# Altium PCB PCB_ESP32_GROUPE5.PcbDoc
Units mm, origin at the board's own origin, x right, y up, seen from the top; angles counter-clockwise.
Board outline 70 x 50 mm, 4 copper layers (Top Layer, Layer 2, Layer 3, Bottom Layer), stack 1.536 mm thick; 72 components, 69 nets, 304 pads, 61 vias.
Unrouted connection lines stored in the file: 15.
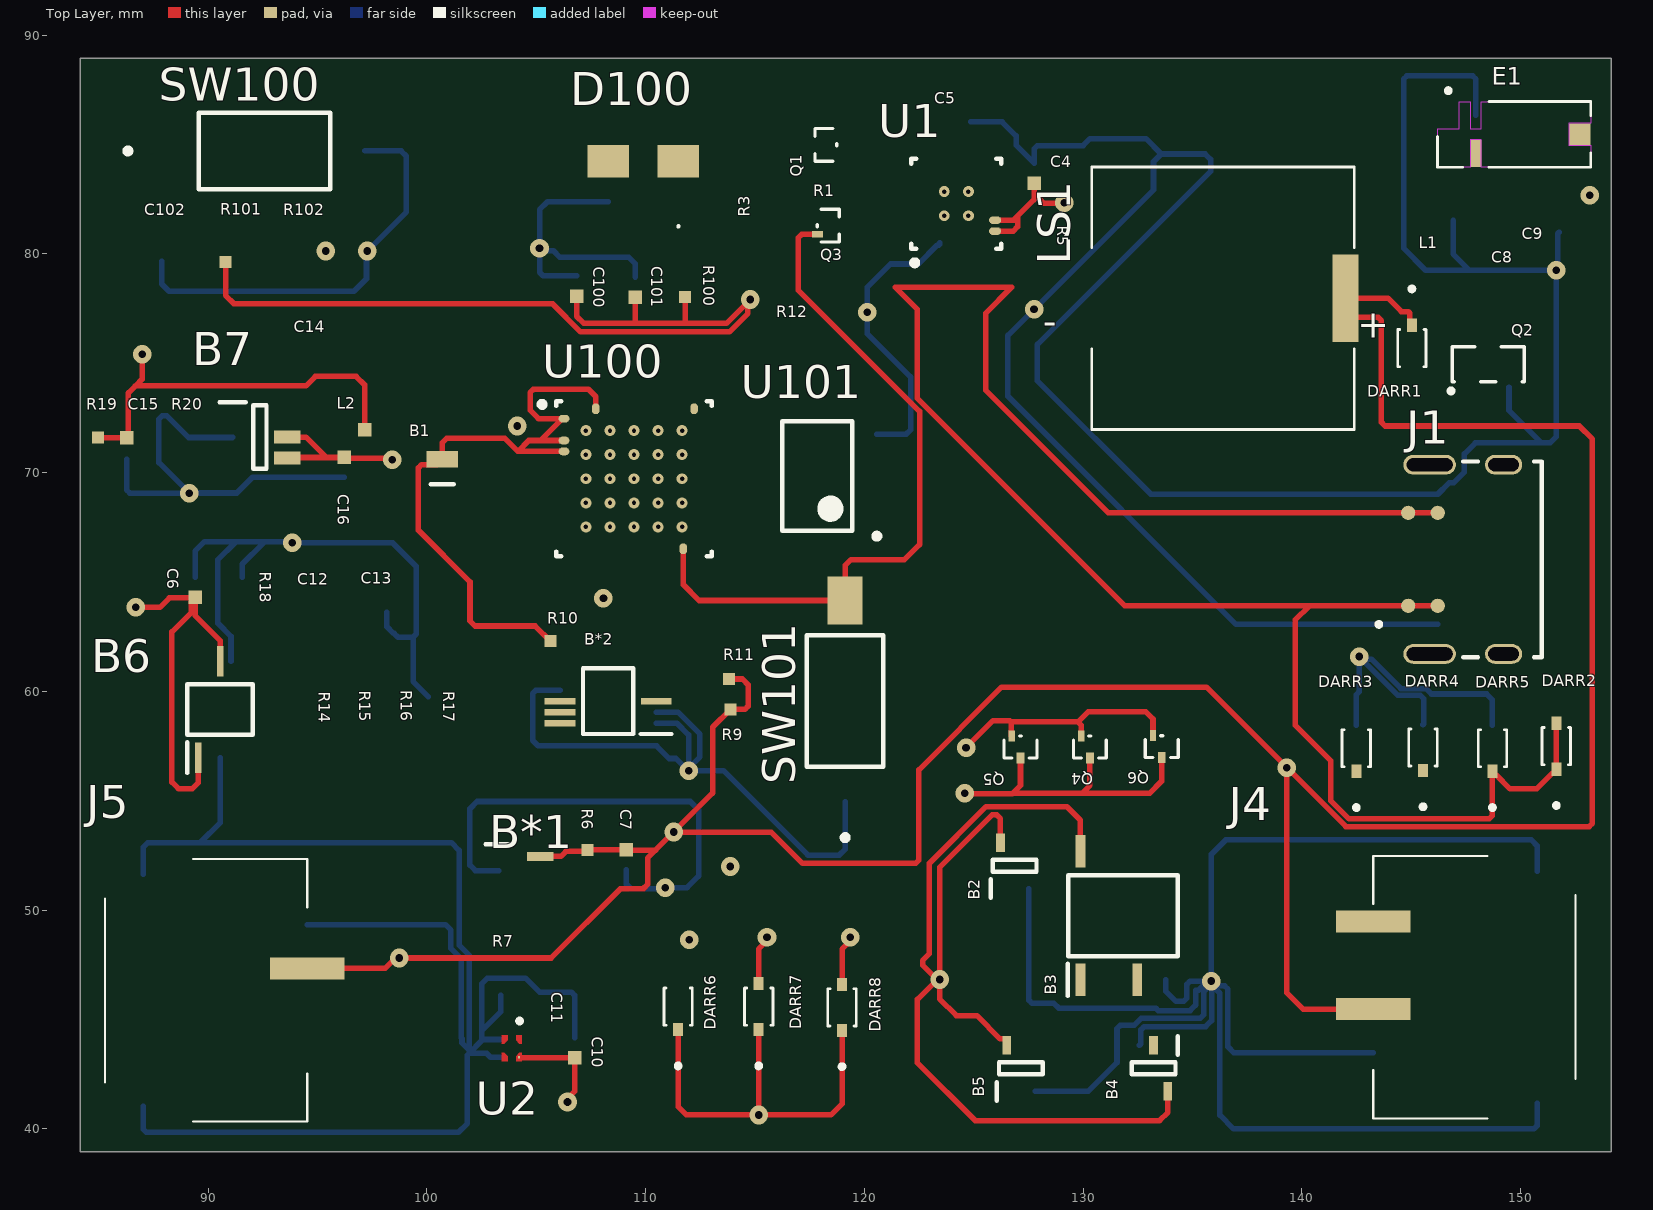
[diagram p0: Top Layer view]
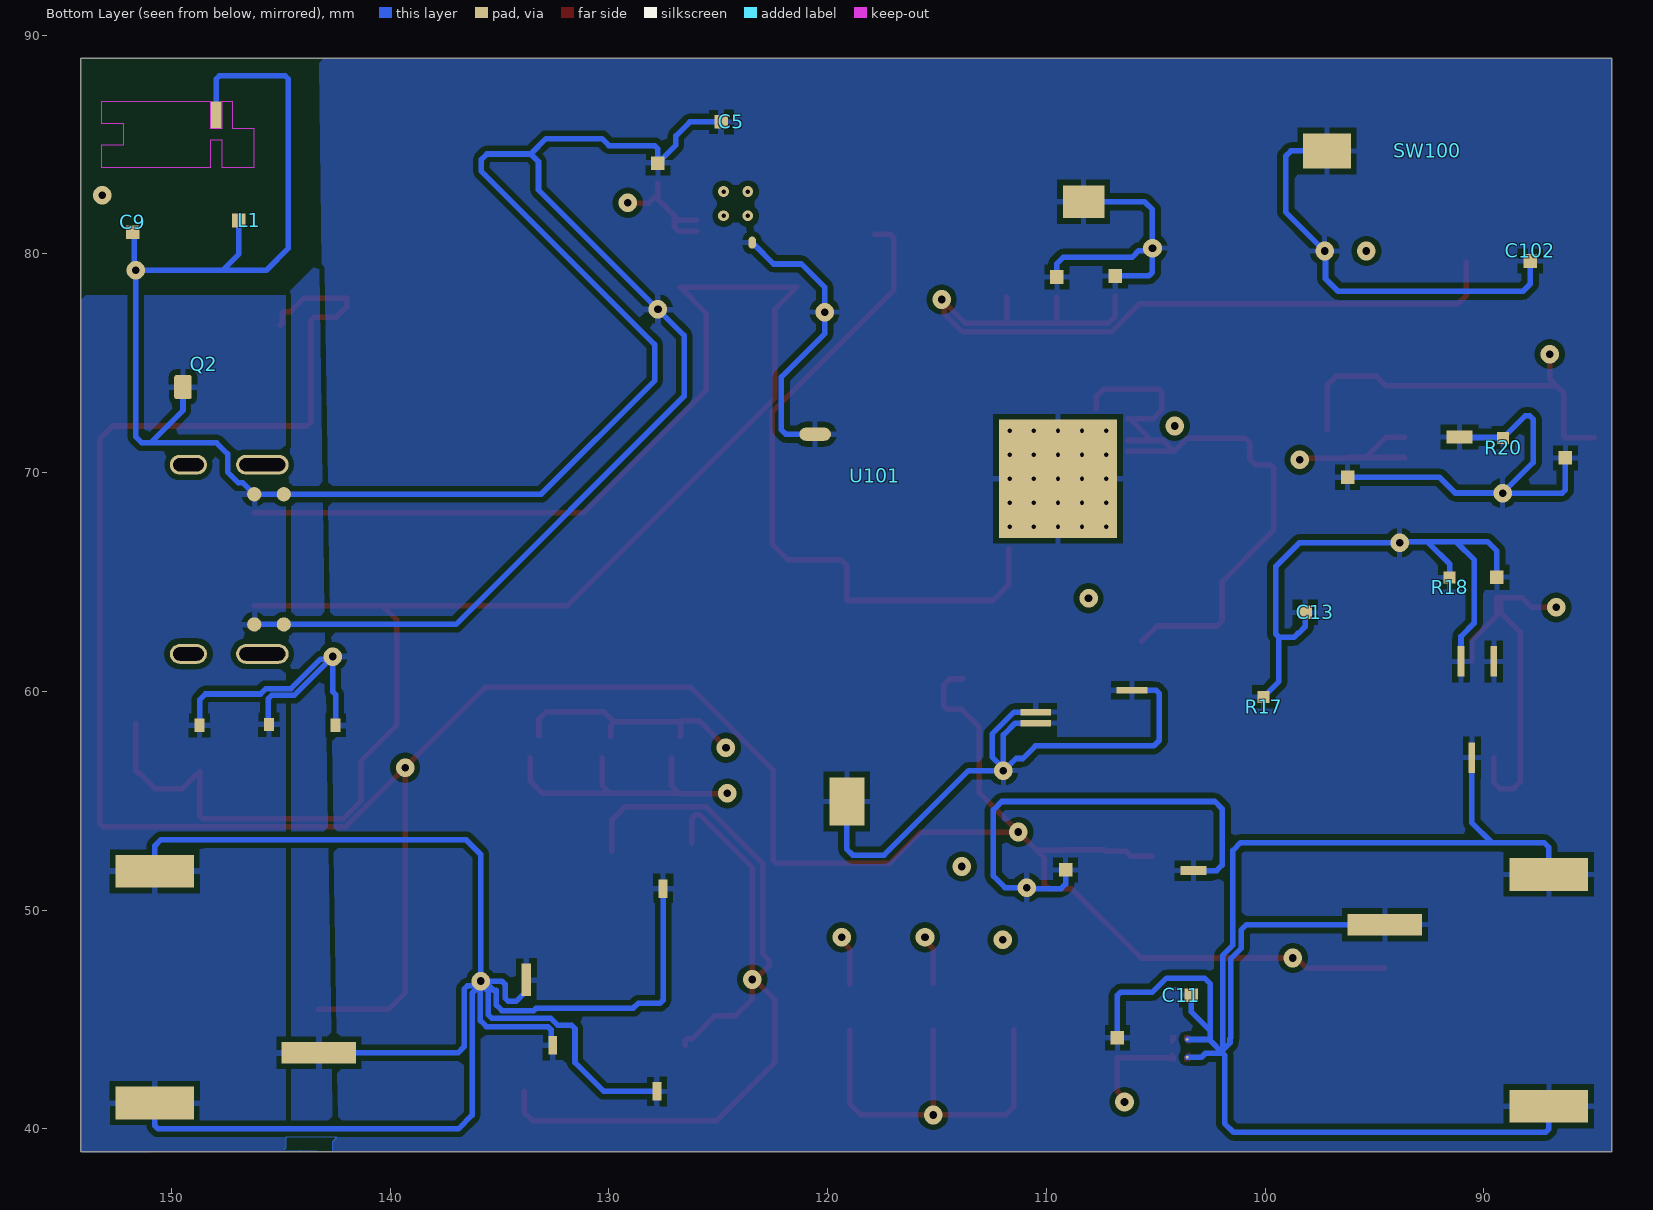
[diagram p1: Bottom Layer view, seen from below]
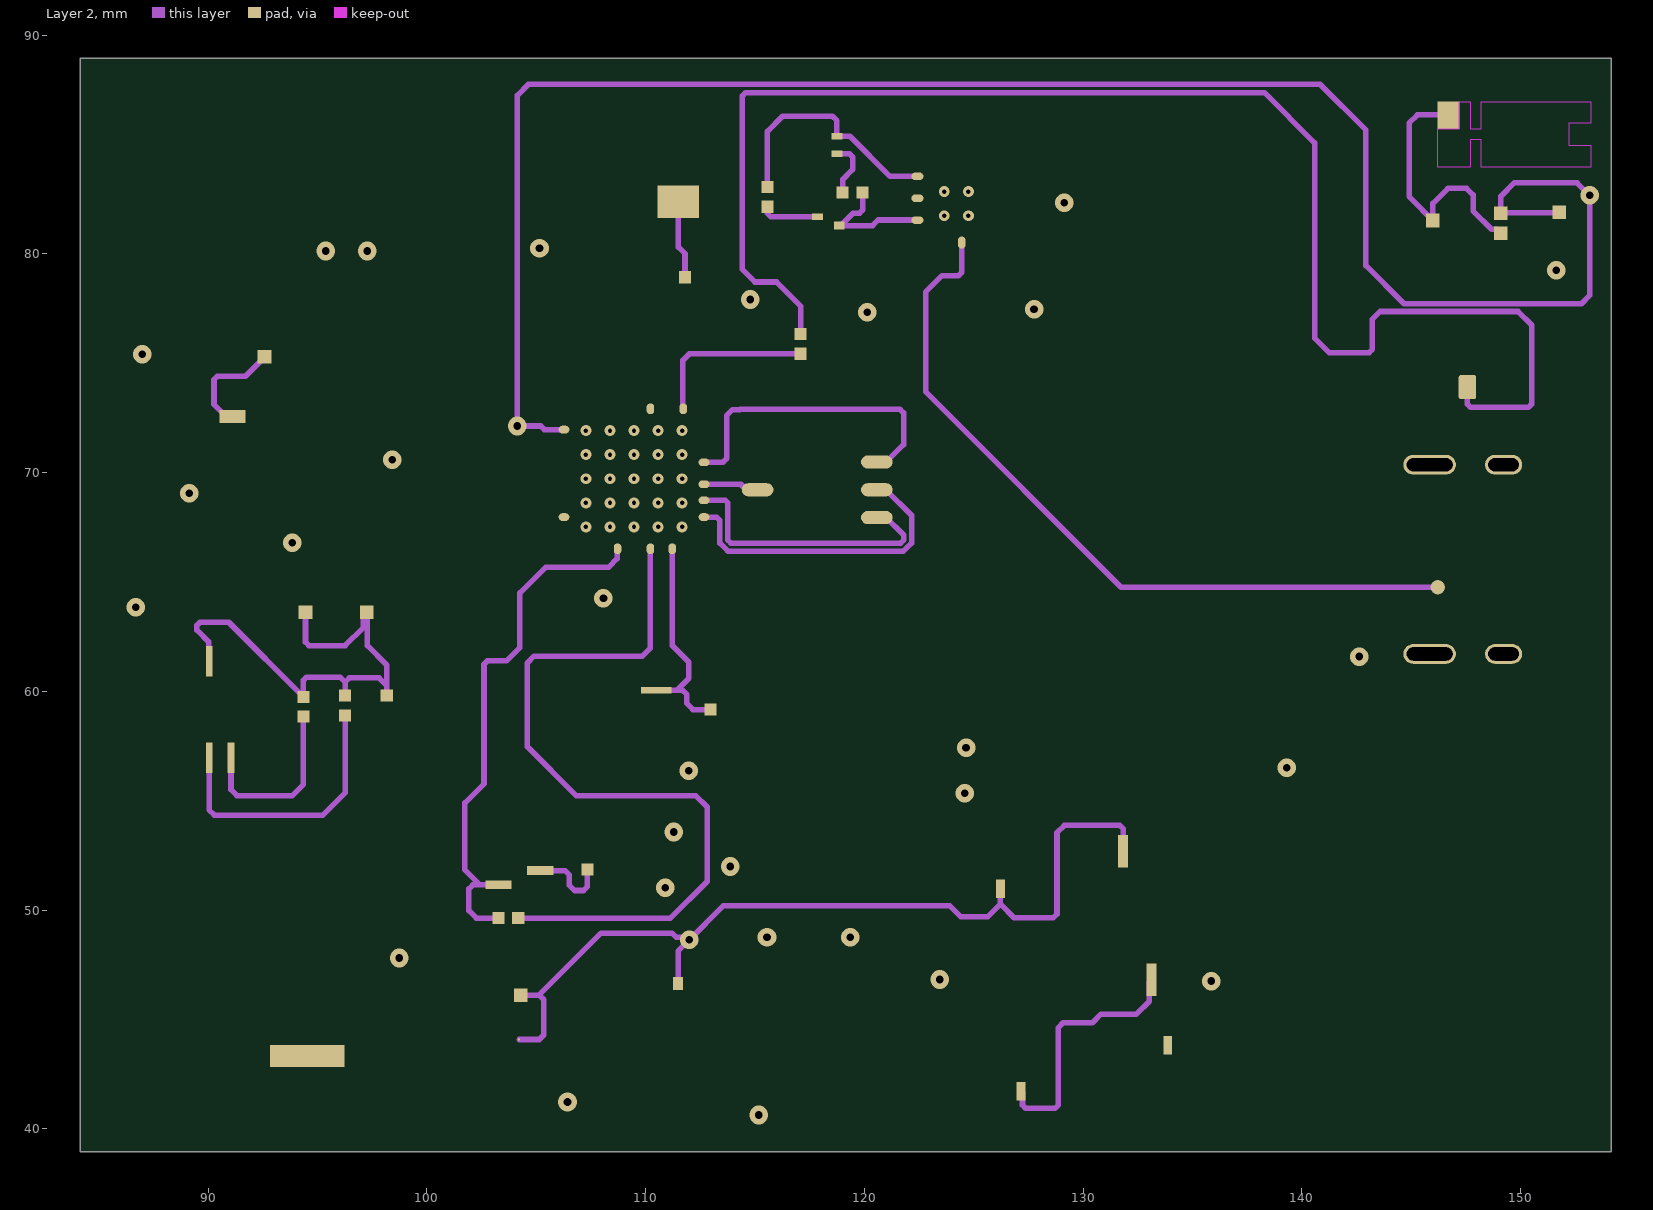
[diagram p2: Layer 2]
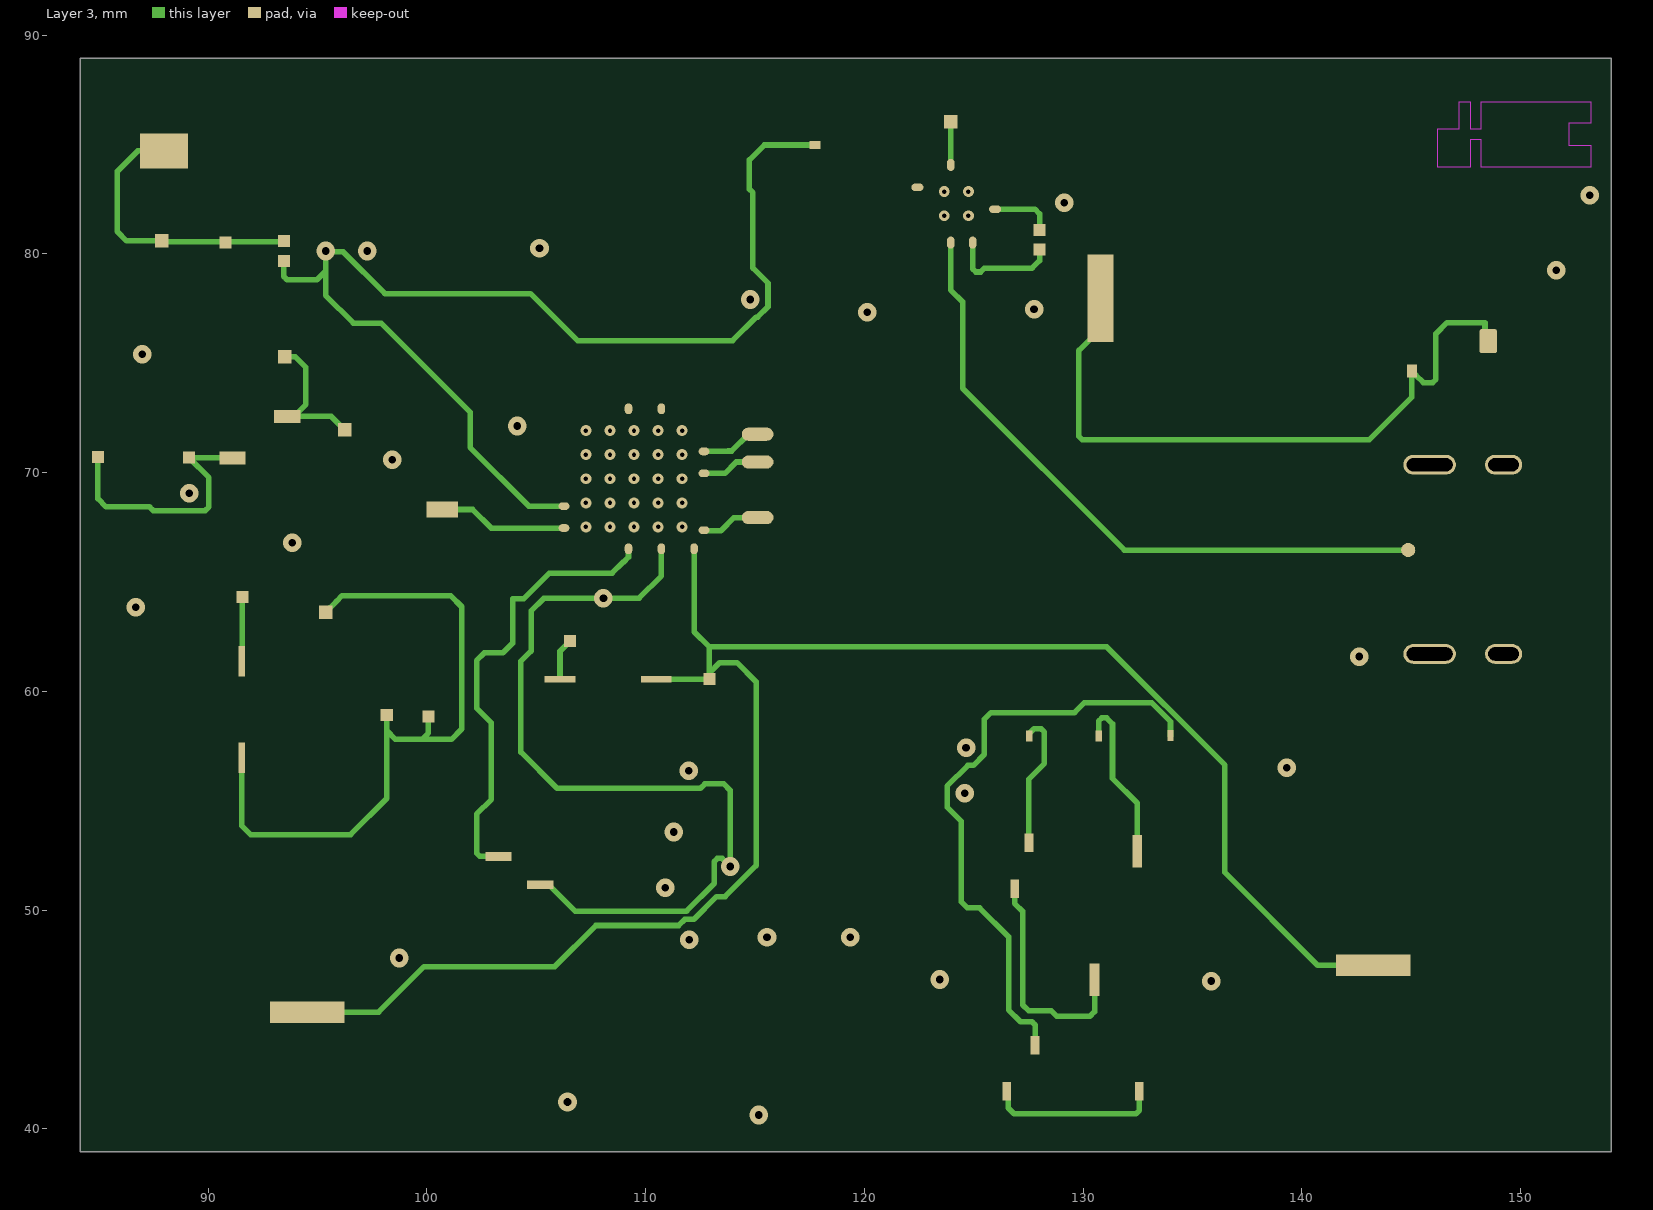
[diagram p3: Layer 3]
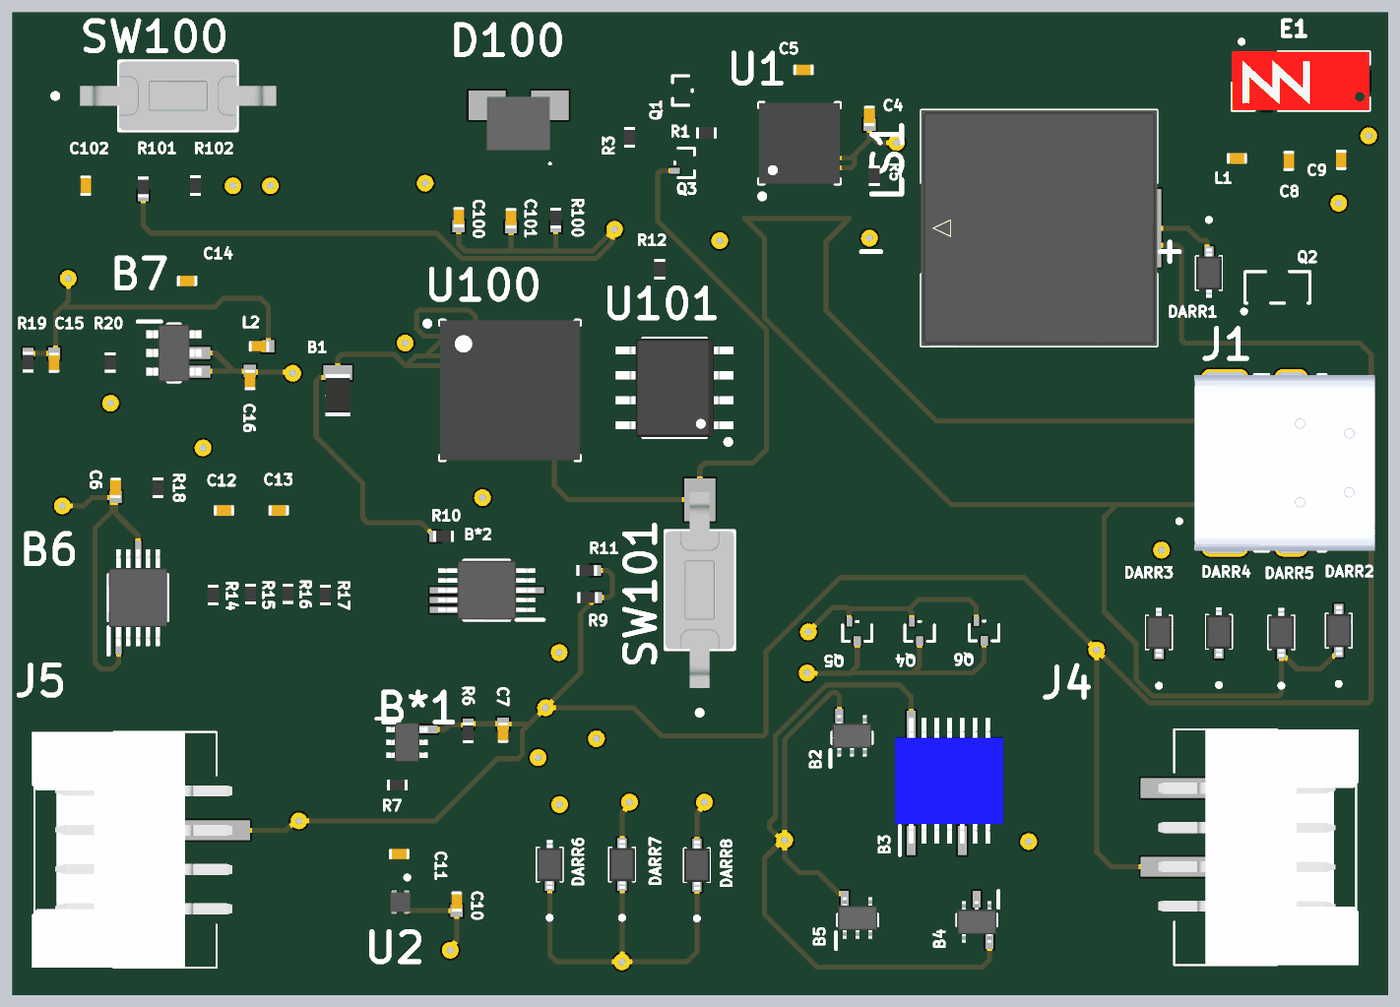
[diagram p4: 3D render of the assembled board from above, using the file's embedded part models]

## Layer stack, top to bottom
Top Solder: solder mask 0.0102, SM-001, Dk 3.5
Top Layer: signal copper 0.018
Dielectric 1: prepreg 0.36, FR-4, Dk 4.8
Layer 2: signal copper 0.035
Dielectric 2: core 0.71, FR-4, Dk 4.8
Layer 3: signal copper 0.035
Dielectric 3: prepreg 0.36, FR-4, Dk 4.8
Bottom Layer: signal copper 0.018
Bottom Solder: solder mask 0.0102, SM-001, Dk 3.5

## Board outline
84.152,38.954 84.152,88.954 154.152,88.954 154.152,38.954

## Design rules (kind name [scope] priority, off if disabled: settings)
Clearance [All] p1: gap=0.254 ignorepadtopadclearanceinfootprint=FALSE except(0: Arc-Hole Track-Hole SMDPad-Hole THPad-Hole Via-Hole Fill-Hole Poly-Hole Region-Hole Text-Hole; 0.1: Arc-Arc Arc-Track Track-Track)
MinimumSolderMaskSliver [All] p1: minsoldermaskwidth=0.1
NetAntennae [InNet('No Net')] p1: netantennaetolerance=10
PolygonConnect [All] p1: connectstyle=Relief reliefconductorwidth=0.254 reliefentries=4 polygonreliefangle="90 Angle" airgapwidth=0.254
RoutingVias [All] p1: holewidth=0.711 width=1.27 viastyle="Through Hole" minholewidth=0.711 minwidth=1.27 maxholewidth=0.711 maxwidth=1.27
ShortCircuit [All] p1: allowed=TRUE
SilkToSilkClearance [All] p1: silktosilkclearance=0.1
SilkToSolderMaskClearance [IsPad] p1: minsilkscreentomaskgap=0.1 clearancetoexposedcopper=TRUE
SolderMaskExpansion [All] p1: expansion=0.102 istentingtop=FALSE
SupplyNets "Schematic Supply Nets_12" [InNet('3V3_VHT')] p1: voltage=0.000
SupplyNets "Schematic Supply Nets_11" [InNet('+3.3V')] p2: voltage=0.000
SupplyNets "Schematic Supply Nets_10" [InNet('3V3_VUSB')] p3: voltage=0.000
SupplyNets "Schematic Supply Nets_9" [InNet('VIN')] p4: voltage=0.000
SupplyNets "Schematic Supply Nets_8" [InNet('VCC')] p5: voltage=0.000
SupplyNets "Schematic Supply Nets_7" [InNet('VBUS')] p6: voltage=0.000
SupplyNets "Schematic Supply Nets_6" [InNet('GND')] p7: voltage=0.000
SupplyNets "Schematic Supply Nets_5" [InNet('3V3')] p8: voltage=0.000
SupplyNets "Schematic Supply Nets_4" [InNet('valim')] p9: voltage=0.000
SupplyNets "Schematic Supply Nets_3" [InNet('+12')] p10: voltage=0.000
SupplyNets "Schematic Supply Nets_2" [InNet('3V3_VBT')] p11: voltage=0.000
SupplyNets "Schematic Supply Nets_1" [InNet('VUSB')] p12: voltage=0.000
SupplyNets "Schematic Supply Nets" [InNet('+3V')] p13: voltage=0.000
UnRoutedNet [All] p1: checkbadconnections=TRUE
Width [All] p1: maxlimit=0.254 minlimit=0.254 preferedwidth=0.254
24 further rules are at their usual default settings.

## Classes and differential pairs
component class "Unité de traitement": C100 C101 C102 D100 R100 R101 R102 SW100 SW101 U100 U101
component class "Régulateur USB HT BT": 2 B6 B7 C6 C10 C11 C12 C13 C14 C15 C16 L2 R14 R16 R17 R18 R19 R20 U2
component class Mesures: B1 B*1 B*2 C7 R6 R7 R9 R10 R11
component class Connecteurs: J3 J4 J5
component class Alimentation: B2 B3 B4 B5 C1 C2 C3 C4 C5 DARR2 DARR3 DARR4 DARR5 DARR6 DARR7 DARR8 J2 Q1 Q3 Q4 Q5 Q6 R1 R2 R3 R4 R5 U1
component class "Accesoire antenne et buzzer": C8 C9 DARR1 E1 L1 LS1 Q2 R12

## Components (designator, comment, footprint, x,y, rotation, side; value= is the part's Value field where it differs from the comment)
B1 "NB12K00103JBB" RESC2212X50N 100.711,69.469 r270 top
B2 "MC74VHC1GT32DFT1G" SOT65P210X110-5N#1 126.876,52.04 r90 top
B3 "74VHC05FT" SOP65P640X120-14N 131.829,49.754 r90 top
B4 "MC74VHC1GT32DFT1G" SOT65P210X110-5N#2 133.226,42.769 r270 top
B5 "MC74VHC1GT32DFT1G" SOT65P210X110-5N#3 127.161,42.769 r90 top
B6 "TPS62056DGSG4" SOP50P490X110-10N#1 90.551,59.175 r90 top
B7 "LMR50410Y3FQDBVRQ1" SOT95P280X145-6N 92.375,71.628 r0 top
B*1 "TMP126DCKR" SOT65P210X110-6N 104.232,51.811 r0 top
B*2 "INA237AIDGST" SOP50P490X110-10N#2 108.29,59.555 r180 top
C4 "Comment" CAPC1005X06N#1 127.762,83.693 r90 top
C5 "Comment" CAPC1005X06N#2 124.408,86.038 r0 top
C6 "Comment" CAPC1005X06N#1 89.408,64.763 r90 top
C7 "1uF" CAPC1005X06N#1 109.124,52.304 r270 top
C8 "0.6 pF" CAPC1005X06N#3 149.098,81.407 r270 top
C9 "0.4 pF" CAPC1005X06N#4 151.765,81.455 r270 top
C10 "1uF" CAPC1005X06N#5 106.759,43.709 r270 top
C11 "1 uF" CAPC1005X06N#6 103.838,46.122 r0 top
C12 "Comment" CAPC1005X06N#7 94.917,63.62 r0 top
C13 "Comment" CAPC1005X06N#4 97.711,63.62 r0 top
C14 "Comment" CAPC1005X06N#7 93.043,75.295 r0 top
C15 "Comment" CAPC1005X06N#1 86.28,71.137 r270 top
C16 "Comment" CAPC1005X06N#1 96.237,70.253 r270 top
C100 "10 uF" CAPC1005X06N#1 106.858,78.534 r90 top
C101 "0.1 uF" CAPC1005X06N#1 109.525,78.486 r90 top
C102 "0.1 uF" CAPC1005X06N#2 87.884,80.137 r270 top
D100 "598-8610-207F" 5988610207F 109.906,83.312 r180 top
DARR1 "SD103AWS-7-F" SD103AWS-7-F#1 145.034,75.692 r270 top
DARR2 "SD103AWS-7-F" SD103AWS-7-F#2 151.638,57.497 r90 top
DARR3 "SD103WS-7-F" SD103AWS-7-F#3 142.494,57.404 r90 top
DARR4 "SD103AWS-7-F" SD103AWS-7-F#3 145.542,57.438 r90 top
DARR5 "SD103AWS-7-F" SD103AWS-7-F#3 148.717,57.404 r90 top
DARR6 "SD103AWS-7-F" SD103AWS-7-F#4 111.491,45.593 r90 top
DARR7 "SD103AWS-7-F" SD103AWS-7-F#2 115.174,45.593 r90 top
DARR8 "SD103AWS-7-F" SD103AWS-7-F#2 118.984,45.559 r90 top
E1 "NN03-320" XCVR_NN03-320 149.709,85.467 r180 top
J1 "Use" USB4085-GF-A 149.225,66.04 r90 top
J4 "114020164" 114020164#1 147.066,46.482 r90 top
J5 "114020164" 114020164#2 90.735,46.338 r270 top
L1 "2.2 nH" LQPC1005X06N#1 143.661,78.736 r180 top
L2 "Comment" LQPC1005X06N#2 99.499,74.759 r0 top
LS1 "Comment" SPKR_PKLCS1212E40A1-R1 136.398,77.978 r180 top
Q1 "SI3139K-TP" SI3139K-TP#1 118.245,84.982 r90 top
Q2 "SS8050-G" SS8050-G 148.524,74.964 r0 top
Q3 "SI3139K-TP" SI3139K-TP#2 118.356,81.299 r270 top
Q4 "SI3139K-TP" SI3139K-TP#3 130.317,57.461 r180 top
Q5 "SI3139K-TP" SI3139K-TP#3 127.142,57.461 r180 top
Q6 "SI3139K-TP" SI3139K-TP#3 133.6,57.477 r180 top
R1 "Comment" RESC1005X06N#1 119.465,82.817 r0 top
R3 "Comment" RESC1005X06N#1 115.57,82.608 r90 top
R5 "Comment" RESC1005X06N#2 128.016,80.645 r90 top
R6 "10kΩ" RESC1005X06N#3 107.346,52.304 r270 top
R7 "10KΩ" RESC1005X06N#1 103.732,49.637 r180 top
R9 "4.7kΩ" RESC1005X06N#3 113.428,59.174 r180 top
R10 "100Ω" RESC1005X06N#4 106.099,62.297 r0 top
R11 "4.7kΩ" RESC1005X06N#4 113.37,60.571 r180 top
R12 "10kΩ" RESC1005X06N#1 117.094,75.888 r90 top
R14 "Comment" RESC1005X06N#1 94.361,59.302 r270 top
R15 "Comment" RESC1005X06N#1 96.266,59.36 r270 top
R16 "Comment" RESC1005X06N#5 98.171,59.371 r270 top
R17 "Comment" RESC1005X06N#6 100.076,59.302 r270 top
R18 "Comment" RESC1005X06N#7 91.567,64.763 r90 top
R19 "Comment" RESC1005X06N#4 84.963,71.162 r270 top
R20 "Comment" RESC1005X06N#7 89.125,71.142 r90 top
R100 "150Ω" RESC1005X06N#3 111.811,78.486 r90 top
R101 "10kΩ" RESC1005X06N#8 90.805,80.079 r270 top
R102 "10kΩ" RESC1005X06N#2 93.472,80.137 r90 top
SW100 "FSMSM" TECO-FSMSM-2_V#1 92.583,84.709 r0 top
SW101 "FSMSM" TECO-FSMSM-2_V#2 119.126,59.563 r90 top
U1 "CP2104-F03-GM" PQFN50P400X400X80_HS-25N 124.206,82.296 r90 top
U2 "NCP167BMX330TBG" NCP167BMX330TBG 103.894,43.685 r270 top
U100 "ESP32-PICO-D4" PQFN50P700X700X104_HS-49N 109.474,69.723 r0 top
U101 "IS66WVS1M8BLL-104NLI" SOIC127P600X175-8N 117.85,69.854 r180 top

## Footprints (in the part's own frame and the unit in brackets; to place one, negate y for a bottom-side part, rotate by r counter-clockwise, add the part's x,y. Pads: shape width x height; smd on the part's side, far side on the other; paste and mask are expansions set on the pad)
114020164#1 [mm]
  rect 1x3.4 smd far side: 1(-3,3.8)
  rect 1x3.4 smd: 2(-1,3.8) 4(3,3.8)
  rect 1x3.4 on Mid2: 3(1,3.8)
  rect 1.5x3.6 smd far side: MP1(-5.3,-3.7) MP2(5.3,-3.7)
  silkscreen extent -6,-5.45 6,3.8, body extent -6,-5.59 6,4.6, height 5.2
114020164#2 [mm]
  rect 1x3.4 smd far side: 1(-3,3.8)
  rect 1x3.4 smd: 2(-1,3.8)
  rect 1x3.4 on Mid2: 3(1,3.8)
  rect 1x3.4 on Mid1: 4(3,3.8)
  rect 1.5x3.6 smd far side: MP1(-5.3,-3.7) MP2(5.3,-3.7)
  silkscreen extent -6,-5.45 6,3.8, body extent -6,-5.59 6,4.6, height 5.2
5988610207F [mm]
  rect 1.9x1.5 on Mid1: 1(-1.6,0.925)
  rect 1.9x1.5 smd far side: 2(1.6,0.925)
  rect 1.9x1.5 smd: 3(-1.6,-0.925) 4(1.6,-0.925)
  silkscreen extent -1.65,2 -1.55,2.1, body extent -1.6,-1.35 1.6,1.35, height 0.9
CAPC1005X06N#1 [mm] "Chip Capacitor, 2-Leads, Body 1,00x0,50mm, IPC Medium Density"
  rect 0.62x0.62 smd: 1(-0.46,0)
  rect 0.62x0.62 smd far side: 2(0.46,0)
  body extent -0.53,-0.28 0.53,0.28, height 0.55
CAPC1005X06N#2 [mm] "Chip Capacitor, 2-Leads, Body 1,00x0,50mm, IPC Medium Density"
  rect 0.62x0.62 on Mid2: 1(-0.46,0)
  rect 0.62x0.62 smd far side: 2(0.46,0)
  body extent -0.53,-0.28 0.53,0.28, height 0.55
CAPC1005X06N#3 [mm] "Chip Capacitor, 2-Leads, Body 1,00x0,50mm, IPC Medium Density"
  rect 0.62x0.62 on Mid1: 1(-0.46,0) 2(0.46,0)
  body extent -0.53,-0.28 0.53,0.28, height 0.55
CAPC1005X06N#4 [mm] "Chip Capacitor, 2-Leads, Body 1,00x0,50mm, IPC Medium Density"
  rect 0.62x0.62 on Mid1: 1(-0.46,0)
  rect 0.62x0.62 smd far side: 2(0.46,0)
  body extent -0.53,-0.28 0.53,0.28, height 0.55
CAPC1005X06N#5 [mm] "Chip Capacitor, 2-Leads, Body 1,00x0,50mm, IPC Medium Density"
  rect 0.62x0.62 smd far side: 1(-0.46,0)
  rect 0.62x0.62 smd: 2(0.46,0)
  body extent -0.53,-0.28 0.53,0.28, height 0.55
CAPC1005X06N#6 [mm] "Chip Capacitor, 2-Leads, Body 1,00x0,50mm, IPC Medium Density"
  rect 0.62x0.62 smd far side: 1(-0.46,0)
  rect 0.62x0.62 on Mid1: 2(0.46,0)
  body extent -0.53,-0.28 0.53,0.28, height 0.55
CAPC1005X06N#7 [mm] "Chip Capacitor, 2-Leads, Body 1,00x0,50mm, IPC Medium Density"
  rect 0.62x0.62 on Mid1: 1(-0.46,0)
  rect 0.62x0.62 on Mid2: 2(0.46,0)
  body extent -0.53,-0.28 0.53,0.28, height 0.55
LQPC1005X06N#1 [mm]
  rect 0.62x0.62 smd far side: 1(-3.254,-2.794)
  rect 0.62x0.62 on Mid1: 2(-2.334,-2.794)
  body extent -3.32,-3.07 -2.27,-2.52, height 0.55
LQPC1005X06N#2 [mm]
  rect 0.62x0.62 on Mid2: 1(-3.254,-2.794)
  rect 0.62x0.62 smd: 2(-2.334,-2.794)
  body extent -3.32,-3.07 -2.27,-2.52, height 0.55
NCP167BMX330TBG [mm] "Régulateurs de tension LDO LDO 700 MA ULTRA-LOW NOISE 3.3V"
  rect 0.1x0.1 on Mid1 paste-1 mask+0: 1(-0.405,0.325)
  rect 0.1x0.1 smd far side paste-1 mask+0: 2(-0.405,-0.325) 3(0.405,-0.325)
  rect 0.1x0.1 smd paste-1 mask+0: 4(0.405,0.325)
  rect 0.52x0.52 on Mech1 rot 45 mask+0.05: 5(0,0)
  Top Layer region: -0.21,0.345 -0.36,0.195 -0.6,0.195 -0.6,0.455 -0.21,0.455
  Top Layer region: -0.21,-0.345 -0.21,-0.455 -0.6,-0.455 -0.6,-0.195 -0.36,-0.195
  Top Layer region: 0.6,-0.455 0.21,-0.455 0.21,-0.345 0.36,-0.195 0.6,-0.195
  Top Layer region: 0.6,0.195 0.36,0.195 0.21,0.345 0.21,0.455 0.6,0.455
  silkscreen extent -1.35,0.25 -1.15,0.45, body extent -0.5,-0.5 0.5,0.5, height 0.38
PQFN50P400X400X80_HS-25N [mm] "PQFN, 24-Leads, Body 4,00x4,00mm, Pitch 0,50mm, Thermal Pad 2,65x2,65mm, IPC Medium Density"
  oval 0.55x0.35 on Mech1: 1(-1.775,1.25) 6(-1.775,-1.25) 13(1.775,-1.25) 14(1.775,-0.75) 15(1.775,-0.25) 17(1.775,0.75) 18(1.775,1.25)
  oval 0.55x0.35 smd far side: 2(-1.775,0.75)
  oval 0.55x0.35 on Mid2: 3(-1.775,0.25) 5(-1.775,-0.75) 16(1.775,0.25)
  oval 0.55x0.35 on Mid1: 4(-1.775,-0.25)
  oval 0.35x0.55 smd: 7(-1.25,-1.775) 8(-0.75,-1.775)
  oval 0.35x0.55 on Mid2: 9(-0.25,-1.775) 20(0.75,1.775)
  oval 0.35x0.55 on Mech1: 10(0.25,-1.775) 11(0.75,-1.775) 12(1.25,-1.775) 22(-0.25,1.775) 24(-1.25,1.775)
  oval 0.35x0.55 on Mid1: 19(1.25,1.775) 21(0.25,1.775) 23(-0.75,1.775)
  rect 2.65x2.65 on Mech1: 25(0,0)
  silkscreen extent -2.82,-2.05 2.05,2.05, body extent -2.05,-2.05 2.05,2.05, height 0.8
PQFN50P700X700X104_HS-49N [mm] "PQFN, 48-Leads, Body 7,00x7,00mm, Pitch 0,50mm, Thermal Pad 5,40x5,40mm, IPC Medium Density"
  oval 0.5x0.35 smd: 1(-3.2,2.75) 3(-3.2,1.75) 4(-3.2,1.25)
  oval 0.5x0.35 on Mid1: 2(-3.2,2.25) 10(-3.2,-1.75) 27(3.2,-1.75) 29(3.2,-0.986) 30(3.2,-0.25) 32(3.2,0.75)
  oval 0.5x0.35 on Mech1: 5(-3.2,0.75) 6(-3.2,0.25) 7(-3.2,-0.25) 8(-3.2,-0.75) 12(-3.2,-2.75) 25(3.2,-2.75) 28(3.2,-1.35) 34(3.2,1.75) 35(3.2,2.25) 36(3.2,2.75)
  oval 0.5x0.35 on Mid2: 9(-3.2,-1.25) 11(-3.2,-2.25) 26(3.2,-2.35) 31(3.2,0.25) 33(3.2,1.25)
  oval 0.35x0.5 on Mech1: 13(-2.75,-3.2) 14(-2.25,-3.2) 15(-1.75,-3.2) 16(-1.25,-3.2) 19(0.25,-3.2) 39(1.75,3.2) 42(0.25,3.2) 44(-0.75,3.2) 45(-1.25,3.2) 47(-2.25,3.2) 48(-2.75,3.2)
  oval 0.35x0.5 on Mid1: 17(-0.75,-3.2) 20(0.75,-3.2) 22(1.75,-3.2) 38(2.25,3.2) 41(0.75,3.2)
  oval 0.35x0.5 on Mid2: 18(-0.25,-3.2) 21(1.25,-3.2) 24(2.75,-3.2) 40(1.25,3.2) 43(-0.25,3.2)
  oval 0.35x0.5 smd: 23(2.25,-3.2) 37(2.75,3.2) 46(-1.75,3.2)
  rect 5.4x5.4 smd far side: 49(0,0)
  silkscreen extent -4.32,-3.55 3.55,3.55, body extent -3.55,-3.55 3.55,3.55, height 1.04
RESC1005X06N#1 [mm] "Chip Resistor, 2-Leads, Body 1,00x0,50mm, IPC Medium Density"
  rect 0.55x0.55 on Mid1: 1(-0.45,0) 2(0.45,0)
  body extent -0.53,-0.28 0.53,0.28, height 0.55
RESC1005X06N#2 [mm] "Chip Resistor, 2-Leads, Body 1,00x0,50mm, IPC Medium Density"
  rect 0.55x0.55 on Mid2: 1(-0.45,0) 2(0.45,0)
  body extent -0.53,-0.28 0.53,0.28, height 0.55
RESC1005X06N#3 [mm] "Chip Resistor, 2-Leads, Body 1,00x0,50mm, IPC Medium Density"
  rect 0.55x0.55 smd: 1(-0.45,0)
  rect 0.55x0.55 on Mid1: 2(0.45,0)
  body extent -0.53,-0.28 0.53,0.28, height 0.55
RESC1005X06N#4 [mm] "Chip Resistor, 2-Leads, Body 1,00x0,50mm, IPC Medium Density"
  rect 0.55x0.55 smd: 1(-0.45,0)
  rect 0.55x0.55 on Mid2: 2(0.45,0)
  body extent -0.53,-0.28 0.53,0.28, height 0.55
RESC1005X06N#5 [mm] "Chip Resistor, 2-Leads, Body 1,00x0,50mm, IPC Medium Density"
  rect 0.55x0.55 on Mid1: 1(-0.45,0)
  rect 0.55x0.55 on Mid2: 2(0.45,0)
  body extent -0.53,-0.28 0.53,0.28, height 0.55
RESC1005X06N#6 [mm] "Chip Resistor, 2-Leads, Body 1,00x0,50mm, IPC Medium Density"
  rect 0.55x0.55 smd far side: 1(-0.45,0)
  rect 0.55x0.55 on Mid2: 2(0.45,0)
  body extent -0.53,-0.28 0.53,0.28, height 0.55
RESC1005X06N#7 [mm] "Chip Resistor, 2-Leads, Body 1,00x0,50mm, IPC Medium Density"
  rect 0.55x0.55 on Mid2: 1(-0.45,0)
  rect 0.55x0.55 smd far side: 2(0.45,0)
  body extent -0.53,-0.28 0.53,0.28, height 0.55
RESC1005X06N#8 [mm] "Chip Resistor, 2-Leads, Body 1,00x0,50mm, IPC Medium Density"
  rect 0.55x0.55 on Mid2: 1(-0.45,0)
  rect 0.55x0.55 smd: 2(0.45,0)
  body extent -0.53,-0.28 0.53,0.28, height 0.55
RESC2212X50N [mm]
  rect 0.75x1.45 smd: 1(-1.15,0)
  rect 0.75x1.45 on Mid2: 2(1.15,0)
  silkscreen extent 0,-0.53 0,0.53, body extent -1.07,-0.63 1.07,0.63, height 0.5
SD103AWS-7-F#1 [mm]
  rect 0.6x0.46 smd: 1(-1.05,0)
  rect 0.6x0.46 on Mid2: 2(1.05,0)
  silkscreen extent -2.81,-0.65 0.85,0.65, body extent -1.25,-0.65 1.25,0.65, height 1.2
SD103AWS-7-F#2 [mm]
  rect 0.6x0.46 smd: 1(-1.05,0) 2(1.05,0)
  silkscreen extent -2.81,-0.65 0.85,0.65, body extent -1.25,-0.65 1.25,0.65, height 1.2
SD103AWS-7-F#3 [mm]
  rect 0.6x0.46 smd: 1(-1.05,0)
  rect 0.6x0.46 smd far side: 2(1.05,0)
  silkscreen extent -2.81,-0.65 0.85,0.65, body extent -1.25,-0.65 1.25,0.65, height 1.2
SD103AWS-7-F#4 [mm]
  rect 0.6x0.46 smd: 1(-1.05,0)
  rect 0.6x0.46 on Mid1: 2(1.05,0)
  silkscreen extent -2.81,-0.65 0.85,0.65, body extent -1.25,-0.65 1.25,0.65, height 1.2
SI3139K-TP#1 [mm] "MOSFET P-Channel MOSFET"
  rect 0.28x0.5 on Mid1 paste+0 mask+0.075: 1(-0.4,-0.5) 2(0.4,-0.5)
  rect 0.36x0.5 on Mid2 paste+0 mask+0.075: 3(0,0.5)
  silkscreen extent -0.75,-0.5 0.75,0.5, body extent -0.6,-0.6 0.6,0.6, height 0.55
SI3139K-TP#2 [mm] "MOSFET P-Channel MOSFET"
  rect 0.28x0.5 on Mid1 paste+0 mask+0.075: 1(-0.4,-0.5)
  rect 0.28x0.5 smd paste+0 mask+0.075: 2(0.4,-0.5)
  rect 0.36x0.5 on Mid1 paste+0 mask+0.075: 3(0,0.5)
  silkscreen extent -0.75,-0.5 0.75,0.5, body extent -0.6,-0.6 0.6,0.6, height 0.55
SI3139K-TP#3 [mm] "MOSFET P-Channel MOSFET"
  rect 0.28x0.5 on Mid2 paste+0 mask+0.075: 1(-0.4,-0.5)
  rect 0.28x0.5 smd paste+0 mask+0.075: 2(0.4,-0.5)
  rect 0.36x0.5 smd paste+0 mask+0.075: 3(0,0.5)
  silkscreen extent -0.75,-0.5 0.75,0.5, body extent -0.6,-0.6 0.6,0.6, height 0.55
SOIC127P600X175-8N [mm] "SOIC, 8-Leads, Body 4,90x3,90mm, Pitch 1,27mm, IPC Medium Density"
  oval 1.45x0.6 on Mid1: 1(-2.725,1.905) 2(-2.725,0.635) 3(-2.725,-0.635) 7(2.725,0.635)
  oval 1.45x0.6 smd far side: 4(-2.725,-1.905)
  oval 1.45x0.6 on Mid2: 5(2.725,-1.905) 6(2.725,-0.635) 8(2.725,1.905)
  silkscreen extent -2.85,-2.5 1.6,2.88, body extent -3,-2.5 3,2.5, height 1.75
SOP50P490X110-10N#1 [mm]
  rect 1.4x0.3 smd: 1(-2.2,1) 8(2.2,0)
  rect 1.4x0.3 on Mid1: 2(-2.2,0.5) 4(-2.2,-0.5) 9(2.2,0.5)
  rect 1.4x0.3 smd far side: 3(-2.2,0) 7(2.2,-0.5) 10(2.2,1)
  rect 1.4x0.3 on Mid2: 5(-2.2,-1) 6(2.2,-1)
  silkscreen extent -2.9,-1.5 1.15,1.5, body extent -2.46,-1.5 2.46,1.5, height 1.06
SOP50P490X110-10N#2 [mm]
  rect 1.4x0.3 smd far side: 1(-2.2,1) 2(-2.2,0.5) 7(2.2,-0.5)
  rect 1.4x0.3 smd: 3(-2.2,0) 8(2.2,0) 9(2.2,0.5) 10(2.2,1)
  rect 1.4x0.3 on Mid1: 4(-2.2,-0.5)
  rect 1.4x0.3 on Mid2: 5(-2.2,-1) 6(2.2,-1)
  silkscreen extent -2.9,-1.5 1.15,1.5, body extent -2.46,-1.5 2.46,1.5, height 1.06
SOP65P640X120-14N [mm]
  rect 1.475x0.45 smd: 1(-2.938,1.95) 5(-2.938,-0.65) 14(2.938,1.95)
  rect 1.475x0.45 on Mid2: 2(-2.938,1.3) 10(2.938,-0.65)
  rect 1.475x0.45 on Mech1: 3(-2.938,0.65) 4(-2.938,0) 8(2.938,-1.95) 9(2.938,-1.3) 12(2.938,0.65) 13(2.938,1.3)
  rect 1.475x0.45 on Mid1: 6(-2.938,-1.3) 11(2.938,0)
  rect 1.475x0.45 smd far side: 7(-2.938,-1.95)
  silkscreen extent -3.67,-2.5 1.85,2.52, body extent -3.1,-2.75 3.3,2.75, height 1.1
SOT65P210X110-5N#1 [mm]
  rect 0.85x0.4 on Mid1: 1(-1.05,0.65)
  rect 0.85x0.4 on Mid2: 2(-1.05,0) 4(1.05,-0.65)
  rect 0.85x0.4 smd far side: 3(-1.05,-0.65)
  rect 0.85x0.4 smd: 5(1.05,0.65)
  silkscreen extent -1.47,-1 0.28,1.1, body extent -0.95,-1 1.15,1, height 1.1
SOT65P210X110-5N#2 [mm]
  rect 0.85x0.4 on Mid1: 1(-1.05,0.65)
  rect 0.85x0.4 smd: 2(-1.05,0) 5(1.05,0.65)
  rect 0.85x0.4 smd far side: 3(-1.05,-0.65)
  rect 0.85x0.4 on Mid2: 4(1.05,-0.65)
  silkscreen extent -1.48,-1 0.27,1.1, body extent -0.95,-1 1.15,1, height 1.1
SOT65P210X110-5N#3 [mm]
  rect 0.85x0.4 on Mid2: 1(-1.05,0.65) 4(1.05,-0.65)
  rect 0.85x0.4 on Mid1: 2(-1.05,0)
  rect 0.85x0.4 smd far side: 3(-1.05,-0.65)
  rect 0.85x0.4 smd: 5(1.05,0.65)
  silkscreen extent -1.47,-1 0.28,1.1, body extent -0.95,-1 1.15,1, height 1.1
SOT65P210X110-6N [mm]
  rect 1.2x0.4 on Mid2: 1(-0.95,0.65) 4(0.95,-0.65)
  rect 1.2x0.4 smd far side: 2(-0.95,0)
  rect 1.2x0.4 on Mid1: 3(-0.95,-0.65) 5(0.95,0)
  rect 1.2x0.4 smd: 6(0.95,0.65)
  silkscreen extent -1.55,1.2 -0.35,1.2, body extent -1.05,-1 1.05,1, height 1
SOT95P280X145-6N [mm]
  rect 1.2x0.6 on Mid1: 1(-1.25,0.95)
  rect 1.2x0.6 smd far side: 2(-1.25,0)
  rect 1.2x0.6 on Mid2: 3(-1.25,-0.95) 6(1.25,0.95)
  rect 1.2x0.6 smd: 4(1.25,-0.95) 5(1.25,0)
  silkscreen extent -1.85,-1.45 0.3,1.6, body extent -1.4,-1.45 1.4,1.45, height 1.2
SPKR_PKLCS1212E40A1-R1 [mm]
  rect 1.2x4 on Mid2: N(5.6,0)
  rect 1.2x4 smd: P(-5.6,0)
  silkscreen extent -6,-6 6,6, body extent -6,-6 6,6, height 3
SS8050-G [mm]
  rrect25% 0.8x1.1 on Mid1 paste+0 mask+0.075: 1(-0.95,-1.05)
  rrect25% 0.8x1.1 smd far side paste+0 mask+0.075: 2(0.95,-1.05)
  rrect25% 0.8x1.1 on Mid2 paste+0 mask+0.075: 3(0,1.05)
  silkscreen extent -1.77,-1.3 1.65,0.8, body extent -1.5,-1.3 1.5,1.3, height 1.1
TECO-FSMSM-2_V#1 [mm] "SMD, 2-Leads, Body 6x3.5mm, Pitch 9.19mm"
  rect 2.2x1.6 on Mid2: 1(-4.595,0)
  rect 2.18x1.6 smd far side: 2(4.595,0)
  silkscreen extent -6.37,-1.75 3,1.75, body extent -4.98,-1.75 4.98,1.75, height 4.4
TECO-FSMSM-2_V#2 [mm] "SMD, 2-Leads, Body 6x3.5mm, Pitch 9.19mm"
  rect 2.2x1.6 smd far side: 1(-4.595,0)
  rect 2.18x1.6 smd: 2(4.595,0)
  silkscreen extent -6.37,-1.75 3,1.75, body extent -4.98,-1.75 4.98,1.75, height 4.4
USB4085-GF-A [mm]
  round 0.65 smd far side: A1(-2.975,4.36) A12(2.975,4.36) B1(2.975,3.01) B12(-2.975,3.01)
  round 0.65 smd: A4(-2.125,4.36) A9(2.125,4.36) B4(2.125,3.01) B9(-2.125,3.01)
  round 0.65 on Mech1: A5(-1.275,4.36) A6(-0.425,4.36) A8(1.275,4.36) B5(1.275,3.01) B6(0.425,3.01) B7(-0.425,3.01)
  round 0.65 on Mid2: A7(0.425,4.36)
  round 0.65 on Mid1: B8(-1.275,3.01)
  oval 0.9x1.7 hole 0.6 slot 1.4 at 90 deg: S1(-4.325,0) S2(4.325,0)
  oval 0.9x2.4 hole 0.6 slot 2.1 at 90 deg: S3(-4.325,3.38) S4(4.325,3.38)
  silkscreen extent -4.47,-1.74 4.47,5.8, body extent -4.47,-4.25 4.47,4.92, height 3.46
XCVR_NN03-320 [mm]
  rect 1x1 smd: 1(-3,0)
  rect 0.5x1.25 smd far side: 2(1.75,-0.875)
  rect 0.5x1.25 smd: 3(1.75,0.875)
  rect 1x1.25 on Mid1: 4(3,-0.875)
  Keep-Out Layer region: 3.5,-0.25 2.5,-0.25 2.5,-1.5 2,-1.5 2,-0.25 1.5,-0.25 1.5,-1.5 -3.5,-1.5 -3.5,-0.5 -2.5,-0.5 -2.5,0.5 -3.5,0.5 -3.5,1.5 1.5,1.5 1.5,0.25 2,0.25 2,1.5 3.5,1.5
  silkscreen extent -3.5,-2.1 3.5,1.5, body extent -3.5,-1.5 3.5,1.5, height 2.02

## Part data
B1: "NTC SMD Thermistor, NB12K, 10K, 5% AVX 10k 0805 Protection NTC Thermistor, 5s, 2 x 1.25 x 1.3mm", Manufacturer_Name="Kyocera AVX", Mouser Part Number=581-NB12K00103JBB, Arrow Part Number=NB12K00103JBB, Arrow Price/Stock=https://www.arrow.com/en/products/nb12k00103jbb/avx, Datasheet Link=https://datasheet.datasheetarchive.com/originals/distributors/Datasheets-DGA6/551314.pdf, Geometry.Height=0.5mm, Manufacturer_Part_Number=NB12K00103JBB, Mouser Price/Stock=https://www.mouser.co.uk/ProductDetail/AVX/NB12K00103JBB/?qs=4%252B6%252BTdINQeDPvI%252BQUQjJ3Q%3D%3D
B2 B4 B5: "Single 2-Input OR Gate, TTL Level", Manufacturer_Name=onsemi, Mouser Part Number=863-C74VHC1GT32DFT1G, Manufacturer_Part_Number=MC74VHC1GT32DFT1G
B3: "Logic Gates CMOS LOGIC IC INVERTER", Manufacturer_Name=Toshiba, Mouser Part Number=757-74VHC05FT, Manufacturer_Part_Number=74VHC05FT
B6: "TEXAS INSTRUMENTS - TPS62056DGSG4 - Synchronous Buck (Step Down) Switching Regulator, Fixed, 2.7V-10Vin, 3.3V/0.8A out, 850kHz, VSSOP-10", Manufacturer_Name="Texas Instruments", Mouser Part Number=595-TPS62056DGSG4, Manufacturer_Part_Number=TPS62056DGSG4
B7: "Régulateurs de tension de commutation Automotive qualified SIMPLE SWITCHER 4-V to 36-V, 1-A synchronous step-down converter 6-SOT-23 -40 to 150", Manufacturer_Name="Texas Instruments", Mouser Part Number=595-R50410Y3FQDBVRQ1, Manufacturer_Part_Number=LMR50410Y3FQDBVRQ1
B*1: "Board Mount Temperature Sensors +/-0.25 C SPI temperature sensor with 175 C operation, CRC and slew-rate alert", Manufacturer_Name="Texas Instruments", Mouser Part Number=595-TMP126DCKR, Manufacturer_Part_Number=TMP126DCKR
B*2: "Current Sense Amplifiers 85-V, 16-bit, I2C output current/voltage/power monitor with alert 10-VSSOP -40 to 125", Manufacturer_Name="Texas Instruments", Mouser Part Number=595-INA237AIDGST, Manufacturer_Part_Number=INA237AIDGST
C4 C5 C6 C12 C13 C14 C15 C16: library part Capacitor, "Capacitor"
C7 C8 C9 C10 C11 C100 C101 C102: library part Capacitor
D100: "Standard LEDs - SMD Red/Green WC 80/50mcd 645/570nm", Manufacturer_Name=Dialight, Mouser Part Number=645-598-8610-207F, Arrow Part Number=598-8610-207F, Arrow Price/Stock=https://www.arrow.com/en/products/598-8610-207f/dialight?region=nac, Datasheet Link=https://media.digikey.com/pdf/Data%20Sheets/Dialight%20PDFs/598%20Series%201210%20Pkg%20Bi-Color.pdf, Geometry.Height=0.8mm, Manufacturer_Part_Number=598-8610-207F, Mouser Price/Stock=https://www.mouser.co.uk/ProductDetail/Dialight/598-8610-207F?qs=7JStj%2FjQ2SFuCjosqwklHQ%3D%3D
DARR1 DARR2 DARR4 DARR5 DARR6 DARR7 DARR8: "Diode Array 3 Independent Schottky 40V 175mA Surface Mount 6-TSSOP, SC-88, SOT-363"
DARR3: library part SD103AWS-7-F, "Diode Array 3 Independent Schottky 40V 175mA Surface Mount 6-TSSOP, SC-88, SOT-363"
E1: "Dual port antenna booster for GNSS, Bluetooth, 5G and UWB (1561 - 1606MHz, 2400 - 2500MHz, 3400 - 3800MHz, 3100 - 4800MHz and 6000 - 10600 MHz), signal booster", Manufacturer_Name=Ignion, Mouser Part Number=128-NN03-320, Manufacturer_Part_Number=NN03-320
J1: library part USB4085-GF-A, "Connecteurs USB USB Type C, 2.0, Rec, TH , G/F, RA , Top Mnt, T & R"
J4 J5: "Seeed Studio Accessories Grove Female Header - SMD-4P-2.0mm-90D-20Pcs", Manufacturer_Name="Seeed Studio", Mouser Part Number=713-114020164, Manufacturer_Part_Number=114020164
L1: library part Bobine
L2: library part Inductor, "Inductor"
Q1 Q3 Q4 Q5 Q6: "MOSFET P-Channel MOSFET"
Q2: "Bipolar Transistors - BJT NPN TRANSISTOR 1.5A 40V"
R1 R3 R5 R14 R15 R16 R17 R18 R19 R20: library part Resistor, "Resistor"
R6 R7 R9 R10 R11 R12 R100 R101 R102: library part Resistor
SW100 SW101: library part CMP-2000-07511-1, "FSMSM Push Button Switch, 50 mA, -35 to 85 degC, 2-Pin SMD, RoHS, Bulk", Case\/Package=SMD/SMT, Contact Current Rating=50mA, Contact Resistance=100mOhm, Manufacturer="TE Connectivity", Max Operating Temperature=85degC, Max Voltage Rating (DC)=12V, Min Operating Temperature=-35degC, Operating Force=180gf, Package Description="2-Pin Surface Mount Device, Body 6 x 3.5 mm, Pitch 9.19 mm", Package Quantity=1000, Voltage Rating (DC)=24V, Actuator Length=1.07mm, Actuator Material=Polyamide, Contact Material=Brass, Contact Plating=Silver, Current Rating=50mA, Datasheet URL=http://www.te.com/commerce/DocumentDelivery/DDEController?Action=showdoc&DocId=Customer+Drawing%7F1437566-3%7FC2%7Fpdf%7FEnglish%7FENG_CD_1437566-3_C2_1437566_3_1_c.dwg.pdf%7F1437566-3, Datasheet Version="Rev. C2, 08/2014", Electrical Life=20000Cycles, ELV=Compliant, Illumination Type=Illuminated, Lead Free=LeadFree, Manufacturer URL=http://www.te.com/, Mechanical Life=20000Cycles, Mount=SurfaceMount, Mounting Technology=SurfaceMount, Orientation=Straight, Package Reference=FSMSM, Packaging=LoosePiece, REACH SVHC=Unknown, RoHSCompliant=true, Switch Travel=0.25mm, Termination=GullWing, Throw Configuration=SPST
U1: library part USBBridge, "USB Bridge, USB to UART USB 2.0 UART Interface 24-QFN (4x4)", Manufacturer 1="Silicon Labs", Manufacturer Part Number 1=CP2104-F03-GM, Supplier 1="Arrow Electronics", Supplier Part Number 1=CP2104-F03-GM
U2: "Régulateurs de tension LDO LDO 700 MA ULTRA-LOW NOISE 3.3V"
U100: library part ESP32, "Système RF sur puce - SoC SIP module ESP32 with 4MByte Flash, Dual Core MCU, Wi-Fi & Bluetooth Combo, LGA48-pin, 7*7mm", Manufacturer 1="Espressif Systems", Supplier Part Number 1=1904-1029-1-ND, Manufacturer Part Number 1=ESP32-PICO-D4, Supplier 1=Digi-Key
U101: library part SRAM, "SRAM 8Mb, SerialRAM, 2.7V-3.6V, 104MHz, 8 pin SOIC 150 mil, RoHS", Manufacturer 1=ISSI, Supplier Part Number 1=706-IS66WVS1M8BLL-104NLI-ND, Manufactuer Part Number 1=IS66WVS1M8BLL-104NLI, Supplier 1=Digi-Key

## Via types
v1: diameter 0.85, hole 0.35, Top Layer to Bottom Layer, 32 vias
v2: diameter 0.5, hole 0.2, Top Layer to Bottom Layer, 29 vias

## Nets (pads, with @x,y where several pads share a name; then routed paths per layer and width w, separated by ;. In a path a pad name is that pad's centre, name@x,y a point inside that pad or via, vN(x,y) a via of type N, cw(c..) or ccw(c..) an arc to the next point about the centre after c; other vN are vias at no path point)
3V3: Q4.2 Q5.2 Q6.2 | length 11.6
  Top Layer w0.254: v1(124.653,57.43) 125.892,58.668 126.642,58.668 126.703,58.608 ; Q5.2 126.729,57.974 126.729,58.581 126.703,58.608 ; Q4.2 129.917,58.459 129.769,58.608 ; Q6.2 133.2,58.742 132.861,59.082 130.243,59.082 129.769,58.608 ; 126.703,58.608 129.769,58.608
3V3_VBT: B3.1 B4.2 B6.9 C12.1 C13.1 DARR8.2 R14.1 R15.1 R16.1 | length 25.4
  Top Layer w0.254: DARR8.2 118.984,48.226 119.365,48.607 v1(119.365,48.768)
  Layer 2 w0.254: B6.9 90.028,61.398 90.028,62.273 89.494,62.807 89.494,63.017 89.643,63.166 90.947,63.166 R14.1 94.361,60.504 94.51,60.653 96.037,60.653 96.266,60.424 ; C12.1 94.457,62.254 94.615,62.096 96.266,62.096 97.099,62.929 97.099,63.468 C13.1 97.282,63.589 97.282,62.096 98.171,61.207 98.171,60.271 ; R15.1 96.266,60.424 ; R16.1 98.171,60.271 ; 96.266,60.424 96.464,60.622 97.82,60.622 98.171,60.271
3V3_VHT: B3.5 C15.1 DARR7.2 L2.2 R19.1 | length 20.6
  Top Layer w0.254: R19.1@84.963,71.597 84.968,71.602 C15.1@86.28,71.602 ; C15.1 86.36,71.677 86.36,73.644 86.686,73.97 ; v1(86.995,75.422) 86.995,74.279 86.686,73.97 ; L2.2 97.165,74.015 96.774,74.406 94.911,74.406 94.475,73.97 86.686,73.97 ; DARR7.2 115.174,48.226 115.555,48.607 v1(115.555,48.768)
3V3_VUSB: B2.1 B3.11 B4.1 C11.2 DARR6.2 U2.1 | length 41.2
  Top Layer w0.254: v1@111.885,48.758 v1(111.999,48.644)
  Layer 2 w0.254: U2.1 105.144,44.09 105.348,44.294 105.348,45.229 105.35,45.23 105.35,45.912 105.14,46.122 107.972,48.954 111.212,48.954 111.407,48.758 v1@111.885,48.758 ; C11.2 105.091,46.122 ; DARR6.2 111.491,48.136 v1(111.999,48.644) 113.549,50.194 123.912,50.194 124.402,49.705 125.654,49.705 126.226,50.277 ; B2.1 126.226,50.277 ; B3.11 131.83,53.734 131.681,53.882 129.15,53.882 128.811,53.543 128.811,49.821 128.636,49.647 126.857,49.647 126.226,50.277
+3.3V: B1.1 B*1.6 C7.1 C100.1 C101.1 DARR1.1 J4.2 J5.2 LS1.P R6.1 R9.1 R10.1 R11.1 R100.1 R101.2 U100.1 U100.3 U100.4 U100.37 U100.43 U100.46 | length 207.7
  Top Layer w0.254: R101.2 90.805,78.105 91.186,77.724 105.754,77.724 107.035,76.442 113.837,76.442 114.68,77.285 v1@114.68,77.806 ; J5.2 98.095,47.338 98.574,47.816 v1(98.735,47.816) 105.686,47.816 108.852,50.982 109.896,50.982 110.097,51.183 110.097,52.387 110.46,52.75 ; B*1.6 106.135,52.461 106.361,52.687 107.279,52.687 R6.1 107.351,52.759 109.119,52.759 C7.1 109.138,52.75 110.46,52.75 ; R10.1 104.954,62.992 102.209,62.992 101.976,63.225 101.976,65.01 99.615,67.371 99.615,70.222 99.764,70.371 100.463,70.371 B1.1 100.711,71.372 100.906,71.566 103.57,71.566 104.163,70.973 ; U100.4 104.163,70.973 ; U100.3 105.199,71.473 ; U100.1 U100.1@106.199,72.473 ; C100.1 106.858,77.15 107.186,76.823 109.491,76.823 ; U100.46 107.724,73.479 107.387,73.816 104.87,73.816 104.721,73.667 104.721,72.859 105.107,72.473 U100.1@106.199,72.473 ; C101.1 109.525,76.856 109.491,76.823 ; R100.1 111.811,76.861 111.849,76.823 ; R11.1 114.425,60.571 114.688,60.308 114.688,59.33 114.539,59.181 113.885,59.181 R9.1 113.068,58.364 113.068,55.358 v1(111.283,53.574) ; v1(114.794,77.92) v1@114.68,77.806 ; J4.2 140.059,45.482 139.319,46.222 v1(139.319,56.515) ; DARR1.1 144.931,76.845 144.931,77.302 144.867,77.365 144.554,77.365 143.941,77.978 LS1.P 141.998,77.58 142.471,77.107 143.488,77.107 143.637,76.958 143.637,72.306 143.807,72.136 152.685,72.136 153.289,71.532 153.289,53.967 153.14,53.818 142.016,53.818 v1(139.319,56.515) ; 104.163,70.973 104.663,71.473 105.199,71.473 ; 105.199,71.473 U100.1@106.199,72.473 ; 109.491,76.823 111.849,76.823 ; 110.46,52.75 v1(111.283,53.574) ; v1(111.283,53.574) 115.74,53.574 117.177,52.137 122.346,52.137 122.495,52.286 122.495,56.411 126.282,60.198 135.636,60.198 v1(139.319,56.515) ; 111.849,76.823 113.696,76.823 v1@114.68,77.806
+3V: Q4.3 Q5.3 Q6.3 | length 13.9
  Top Layer w0.254: v1(124.591,55.342) 124.61,55.322 126.756,55.322 126.776,55.342 ; Q5.3 127.142,55.709 126.776,55.342 ; Q4.3 130.317,55.706 129.953,55.342 ; Q6.3 133.6,55.901 133.042,55.342 129.953,55.342 ; 126.776,55.342 129.953,55.342
+12: B7.4 B7.5 C16.1 | length 7
  Top Layer w0.254: B7.4 93.642,70.695 95.408,70.695 ; B7.5 94.475,71.628 95.408,70.695 ; v1(98.425,70.596) 98.367,70.654 96.261,70.654 96.22,70.695 95.408,70.695
GND: B2.3 B3.7 B4.3 B5.3 B6.3 B6.7 B6.10 B7.2 B*1.2 B*2.1 B*2.2 B*2.7 C4.2 C5.2 C6.2 C7.2 C9.2 C10.1 C11.1 C13.2 C15.2 C16.2 C100.2 C101.2 C102.2 D100.2 DARR3.2 DARR4.2 DARR5.2 E1.2 J1.A1 J1.A12 J1.B1 J1.B12 J4.1 J4.MP1 J4.MP2 J5.1 J5.MP1 J5.MP2 L1.1 Q2.2 R17.1 R18.2 R20.2 SW100.2 SW101.1 U1.2 U2.2 U2.3 U100.49 U101.4 | length 454.9
  Bottom Layer w0.254: C15.2@86.28,70.612 86.28,69.216 86.429,69.067 v1(89.149,69.067) ; J5.MP2 87.035,39.992 87.184,39.843 101.438,39.843 101.854,40.259 101.854,43.376 101.933,43.455 ; J5.MP1 87.035,52.872 87.249,53.086 89.645,53.086 ; C102.2 87.884,78.636 88.225,78.294 96.67,78.294 97.244,78.868 97.244,80.099 v1(97.282,80.137) 99.069,81.924 99.069,84.468 98.828,84.709 SW100.2 ; C6.2 89.408,66.414 89.846,66.852 93.796,66.852 v1(93.853,66.795) 98.444,66.795 99.521,65.717 99.521,62.626 99.373,62.477 ; B6.3 90.551,53.992 89.645,53.086 ; B6.7 91.051,62.521 90.452,63.12 90.452,66.024 91.223,66.795 ; B7.2 91.107,71.61 89.143,71.61 R20.2 88.675,72.042 88.116,72.601 87.906,72.601 87.757,72.452 87.757,70.459 v1(89.149,69.067) ; R18.2 91.567,65.824 92.538,66.795 ; J5.1 100.855,49.338 101.102,49.091 101.102,48.253 101.579,47.777 101.579,44.161 101.611,44.129 101.611,43.938 101.933,43.616 ; C16.2 92.034,69.793 91.313,69.072 89.154,69.072 v1(89.149,69.067) ; C13.2 98.171,62.968 98.485,62.654 98.511,62.654 98.688,62.477 99.373,62.477 ; R17.1 99.373,60.455 99.373,62.477 ; B*1.2 102.22,51.811 101.967,52.064 101.967,54.638 102.3,54.971 112.045,54.971 112.426,54.59 112.426,51.564 111.897,51.034 v1(110.902,51.034) 110.855,50.987 109.333,50.987 109.124,51.195 C7.2 ; C11.1 103.378,45.352 102.511,44.485 ; U2.3 102.919,43.28 102.744,43.455 101.933,43.455 ; U2.2 102.568,44.09 102.511,44.033 ; B*2.7 104.99,60.055 104.838,59.903 104.838,57.771 105.098,57.511 110.505,57.511 111.081,56.935 111.388,56.935 111.943,56.38 v1(111.973,56.38) ; C10.1 106.759,46.105 106.61,46.254 105.156,46.254 104.513,46.897 102.772,46.897 102.511,46.636 102.511,44.485 ; C100.2 105.325,78.994 105.156,79.163 v1(105.156,80.264) ; D100.2 105.519,82.387 105.156,82.024 v1(105.156,80.264) ; C101.2 109.525,79.555 109.224,79.856 106.076,79.856 105.781,80.15 105.27,80.15 v1(105.156,80.264) ; B*2.1 111.43,58.555 111.973,58.012 v1@111.973,56.493 ; B*2.2 111.485,59.055 112.487,58.054 112.487,57.006 v1@111.973,56.493 ; SW101.1 119.126,52.785 118.856,52.515 117.428,52.515 113.563,56.38 v1(111.973,56.38) ; U101.4 121.915,71.759 122.117,71.961 122.117,74.374 120.142,76.349 v1(120.142,77.343) 120.142,78.482 121.202,79.542 122.477,79.542 123.338,80.403 123.412,80.403 123.456,80.447 U1.2 ; C5.2 126.306,86.038 126.942,85.402 126.942,84.973 C4.2 127.762,84.805 127.911,84.953 130.006,84.953 130.329,85.276 132.873,85.276 133.578,84.571 ; B2.3 127.526,45.889 127.675,45.74 128.672,45.74 128.891,45.521 133.325,45.521 133.435,45.412 134.895,45.412 135.15,45.667 135.15,46.342 135.281,46.342 v1@135.701,46.762 ; B5.3 130.235,41.719 131.555,43.039 131.555,44.588 131.704,44.736 132.34,44.736 132.668,45.065 135.366,45.065 135.515,45.214 135.515,46.254 v1@135.862,46.601 ; B4.3 132.649,43.892 132.649,44.533 132.798,44.682 135.606,44.682 135.88,44.955 v1@135.88,46.582 ; B3.7 133.779,46.303 134.254,45.829 134.6,45.829 134.749,45.978 134.749,46.613 134.897,46.762 v1@135.701,46.762 ; DARR3.2 142.494,59.858 142.621,59.985 v1(142.621,61.595) v1@142.735,61.481 ; J4.1 136.895,43.482 136.62,43.758 136.62,46.39 136.471,46.539 136.247,46.539 136.023,46.762 v1(135.862,46.762) ; DARR4.2 145.573,58.519 145.573,59.67 145.424,59.819 144.397,59.819 v1@142.735,61.481 ; J1.B12 J1.A1 136.995,63.065 126.565,73.495 126.565,76.273 v1(127.762,77.47) 133.223,82.931 133.223,84.216 133.578,84.571 ; L1.1 146.915,80.006 147.673,79.248 ; E1.2 147.959,87.989 147.81,88.138 144.802,88.138 144.653,87.989 144.653,80.264 145.669,79.248 147.673,79.248 ; DARR5.2 148.717,59.616 148.448,59.885 145.931,59.885 145.682,60.134 144.534,60.134 143.186,61.481 v1@142.735,61.481 ; Q2.2 149.474,72.852 150.965,71.361 ; J4.MP1 150.766,40.154 150.617,40.005 136.887,40.005 136.258,40.634 136.258,46.205 v1@135.88,46.582 ; J4.MP2 150.766,52.942 150.495,53.213 136.525,53.213 135.862,52.55 v1(135.862,46.762) ; C9.2 151.701,80.932 151.701,79.311 v1(151.638,79.248) ; 89.645,53.086 101.131,53.086 101.482,52.735 101.482,48.401 101.933,47.95 101.933,43.616 ; 101.933,43.455 101.933,43.616 ; 101.933,43.455 102.511,44.033 ; 102.511,44.033 102.511,44.485 ; v1(111.973,56.38) v1@111.973,56.493 ; 133.578,84.571 135.583,84.571 135.832,84.322 135.832,83.776 127.917,75.861 127.917,74.2 133.102,69.015 J1.A12 J1.B1 146.734,69.534 146.939,69.534 147.436,70.031 147.436,70.864 147.933,71.361 150.965,71.361 ; v1@135.701,46.762 v1(135.862,46.762) ; v1@135.862,46.601 v1@135.88,46.582 ; v1@135.862,46.601 v1(135.862,46.762) ; 147.673,79.248 v1(151.638,79.248) ; 150.965,71.361 151.351,71.361 151.638,71.648 v1(151.638,79.248)
  other v2: 107.274,67.523 108.374,67.523 109.474,67.523 110.574,67.523 111.674,67.523 107.274,68.623 108.374,68.623 109.474,68.623 110.574,68.623 111.674,68.623 107.274,69.723 108.374,69.723 109.474,69.723 110.574,69.723 111.674,69.723 107.274,70.823 108.374,70.823 109.474,70.823 110.574,70.823 111.674,70.823 107.274,71.923 108.374,71.923 109.474,71.923 110.574,71.923 111.674,71.923
Net2_1: B6.6 R18.1 | length 2.9
  Layer 3 w0.254: B6.6 91.559,61.383 91.559,64.305 R18.1
NetB1_2: B1.2 U100.11 | length 5.9
  Layer 3 w0.254: B1.2 102.1,68.319 102.958,67.461 106.262,67.461 U100.11
NetB2_2: B2.2 B3.2 | length 10.5
  Layer 3 w0.254: B2.2 126.877,50.314 127.246,49.945 127.246,45.676 127.512,45.41 128.541,45.41 128.808,45.143 130.307,45.143 130.529,45.365 B3.2
NetB2_4: B2.4 Q5.1 | length 6.3
  Layer 3 w0.254: B2.4 127.526,55.995 128.237,56.706 128.237,58.148 128.089,58.297 127.768,58.297 127.542,58.071 Q5.1
NetB3_6: B3.6 B5.2 | length 11.6
  Layer 2 w0.254: B5.2 127.234,41.646 127.234,41.093 127.382,40.944 128.713,40.944 128.872,41.103 128.872,44.636 129.093,44.857 130.43,44.857 130.823,45.25 132.442,45.25 133.031,45.839 133.031,46.718 B3.6
NetB3_12: B3.10 Q4.1 | length 7.8
  Layer 3 w0.254: Q4.1 130.717,58.641 130.866,58.79 131.077,58.79 131.348,58.519 131.348,56.028 132.479,54.896 B3.10
NetB4_4: B4.4 B5.1 | length 7.8
  Layer 3 w0.254: B5.1 126.584,41.646 126.584,40.957 126.846,40.695 132.418,40.695 132.576,40.854 B4.4
NetB5_4: B5.4 Q6.1 | length 27.9
  Layer 3 w0.254: B5.4 127.811,44.753 127.662,44.902 127.143,44.902 126.599,45.445 126.599,48.788 125.277,50.11 124.715,50.11 124.442,50.383 124.442,54.059 123.784,54.717 123.784,55.676 124.733,56.624 124.987,56.624 125.494,57.131 125.494,58.734 125.793,59.033 129.612,59.033 130.053,59.475 133.144,59.475 134,58.619 Q6.1
NetB6_2: B6.2 R15.2 | length 12.7
  Layer 2 w0.254: B6.2 90.051,54.587 90.289,54.349 95.25,54.349 96.266,55.365 R15.2
NetB6_4: B6.4 R14.2 | length 8.2
  Layer 2 w0.254: B6.4 91.051,55.511 91.324,55.238 93.853,55.238 94.361,55.746 R14.2
NetB6_5: B6.5 C12.2 R16.2 R17.2 | length 31.7
  Layer 3 w0.254: B6.5 91.551,53.857 91.948,53.46 96.52,53.46 98.171,55.111 98.171,58.203 ; C12.2 95.867,64.11 95.867,64.12 96.127,64.38 99.287,64.38 99.289,64.382 101.092,64.382 101.6,63.874 101.6,58.286 101.125,57.811 99.786,57.811 ; R16.2 98.171,58.203 ; R17.2 100.076,58.102 99.786,57.811 ; 98.171,58.203 98.563,57.811 99.786,57.811
NetB6_9: 
NetB7_1: B7.1 C14.1 | length 5
  Layer 2 w0.254: B7.1 90.825,72.578 90.275,73.128 90.275,74.257 90.424,74.406 91.704,74.406 92.593,75.295 C14.1
NetB7_3: B7.3 R19.2 R20.1 | length 11.9
  Layer 3 w0.254: R19.2 84.963,68.818 85.344,68.437 87.325,68.437 87.501,68.261 89.867,68.261 90.043,68.437 90.043,69.774 R20.1@89.132,70.685 ; R20.1 R20.1@89.132,70.685 ; B7.3 91.118,70.685 R20.1@89.132,70.685
NetB7_6: B7.6 C14.2 L2.1 | length 6.5
  Layer 3 w0.254: C14.2 93.993,75.295 94.475,74.813 94.475,73.128 B7.6@93.925,72.578 ; B7.6 B7.6@93.925,72.578 ; L2.1 95.632,72.578 B7.6@93.925,72.578
NetB*1_1: B*1.1 U100.18 | length 20.9
  Layer 3 w0.254: B*1.1 102.428,52.461 102.279,52.61 102.279,54.391 102.952,55.064 102.952,58.566 102.279,59.238 102.279,61.414 102.635,61.771 103.486,61.771 103.921,62.206 103.921,64.244 104.436,64.244 105.603,65.411 108.472,65.411 108.966,65.905 108.986,65.905 109.224,66.143 U100.18@109.224,66.523
NetB*1_3: B*1.3 R7.2 U100.17 | length 24.7
  Layer 2 w0.254: R7.2 102.266,49.637 101.923,49.98 101.923,50.976 102.108,51.161 102.433,51.161 ; B*1.3 102.433,51.161 ; U100.17 108.706,66.505 108.706,66.071 108.323,65.688 105.445,65.688 104.258,64.501 104.258,62.008 103.644,61.395 102.764,61.395 102.616,61.246 102.616,55.776 101.745,54.905 101.745,51.848 102.433,51.161
NetB*1_4: B*1.4 U100.21 | length 39.4
  Layer 3 w0.254: B*1.4 105.582,51.161 106.784,49.959 111.875,49.959 113.141,51.226 113.141,52.221 113.29,52.37 113.5,52.37 v1(113.873,51.997) 113.873,55.482 113.582,55.773 112.71,55.773 112.511,55.574 105.964,55.574 104.306,57.231 104.306,61.388 104.769,61.851 104.769,63.681 105.35,64.262 v1(108.077,64.262) 108.081,64.266 109.707,64.266 110.724,65.282 U100.21
NetB*1_5: B*1.5 R6.2 U100.10 | length 3.7
  Layer 2 w0.254: B*1.5 106.323,51.811 106.524,51.61 106.524,51.138 106.76,50.902 107.165,50.902 107.346,51.083 R6.2
NetB*2_4: B*2.4 J5.4 R9.2 U100.22 | length 10.1
  Layer 2 w0.254: B*2.4 111.44,60.055 ; U100.22 111.224,62.092 111.977,61.339 111.977,60.592 111.44,60.055 ; R9.2 112.166,59.174 111.887,59.453 111.887,59.858 111.69,60.055 111.44,60.055
NetB*2_5: B*2.5 J4.3 J5.3 R11.2 U100.24 | length 82.3
  Layer 3 w0.254: J5.3 97.8,45.338 99.881,47.419 105.85,47.419 107.733,49.302 111.517,49.302 111.801,49.586 112.209,49.586 113.248,50.625 113.64,50.625 115.059,52.043 115.059,60.443 114.182,61.32 113.394,61.32 R11.2@112.92,60.846 ; B*2.5 110.498,60.563 112.912,60.563 R11.2 R11.2@112.92,60.846 ; U100.24 112.224,62.731 112.92,62.035 ; J4.3 140.732,47.482 136.487,51.727 136.487,56.632 131.085,62.035 112.92,62.035 ; R11.2@112.92,60.846 112.92,62.035
NetB*2_6: B*2.6 R10.2 | length 1.9
  Layer 3 w0.254: B*2.6 106.09,61.839 R10.2
NetC5_2: C5.1 U1.16 | length 2
  Layer 3 w0.254: C5.1 123.952,86.034 123.952,84.075 U1.16
NetC8_1: C8.1 C9.1 U100.2 | length 87.1
  Layer 2 w0.254: U100.2 105.376,71.973 105.213,72.136 v1(104.14,72.136) 104.14,87.249 104.648,87.757 140.843,87.757 142.931,85.669 142.931,79.465 144.672,77.724 152.781,77.724 153.162,78.105 v1(153.162,82.677) 152.59,83.249 149.711,83.249 149.098,82.636 C8.1 149.122,81.891 151.741,81.891 C9.1
NetC8_2: C8.2 E1.4 L1.2 | length 12.3
  Layer 2 w0.254: E1.4 146.691,86.36 145.288,86.36 144.907,85.979 144.907,82.628 145.505,82.03 145.505,82.02 L1.2 145.995,82.309 146.686,83 147.537,83 147.837,82.7 147.837,81.97 148.676,81.13 148.915,81.13 C8.2
NetC15_2: 
NetC102_1: C102.1 R101.1 R102.2 SW100.1 | length 13.1
  Layer 3 w0.254: SW100.1 86.788,84.709 85.852,83.773 85.852,81.026 86.281,80.597 C102.1 87.918,80.563 90.771,80.563 R101.1 90.834,80.558 93.443,80.558 R102.2
NetD100_1: D100.1 R100.2 | length 3.6
  Layer 2 w0.254: D100.1 111.506,80.312 111.805,80.012 111.805,78.942 R100.2
NetDARR1_2: DARR1.2 LS1.N Q2.3 | length 30.8
  Layer 3 w0.254: LS1.N 130.798,76.578 129.807,75.587 129.807,71.664 129.956,71.515 143.09,71.515 145.034,73.459 DARR1.2@145.034,74.572 ; DARR1.2 DARR1.2@145.034,74.572 ; Q2.3 148.375,76.163 148.375,76.864 146.646,76.864 146.135,76.353 146.135,74.265 145.986,74.116 145.56,74.116 145.207,74.469 145.137,74.469 DARR1.2@145.034,74.572
NetDARR3_1: DARR3.1
NetDARR4_1: DARR4.1
NetJ1_A7: J1.A7 U1.3 | length 30.3
  Layer 3 w0.254: U1.3 123.952,80.517 123.952,78.359 124.504,77.807 124.504,73.851 131.89,66.465 J1.A7
NetJ1_B8: J1.B8 U1.4 | length 35.1
  Layer 2 w0.254: U1.4 124.456,79.159 124.307,79.01 123.555,79.01 122.804,78.259 122.804,73.706 131.745,64.765 J1.B8
NetJ2_A5: 
NetJ2_A6: 
NetJ2_B5: 
NetJ3_3: R7.1 U100.20 | length 36.4
  Layer 2 w0.254: R7.1 111.137,49.637 112.824,51.325 112.824,54.708 112.29,55.242 106.83,55.242 104.594,57.477 104.594,61.296 104.911,61.612 109.857,61.612 110.213,61.968 110.213,66.512 U100.20
NetQ1_1: Q1.1 R1.1 | length 2.6
  Layer 2 w0.254: Q1.1 119.316,84.582 119.465,84.433 119.465,83.861 119.015,83.411 R1.1
NetQ1_2: Q1.2 R3.2 U1.19 | length 11.3
  Layer 2 w0.254: R3.2 115.57,85.599 116.274,86.303 118.536,86.303 118.745,86.094 Q1.2 119.342,85.382 121.178,83.546 U1.19
NetQ1_3: Q1.3 R102.1 U100.9 | length 53.6
  Layer 3 w0.254: R102.1 93.472,78.97 93.621,78.822 94.979,78.822 95.377,79.22 ; U100.9 104.662,68.473 101.981,71.154 101.981,72.771 97.917,76.835 96.647,76.835 95.377,78.105 95.377,79.22 ; Q1.3 115.431,84.982 114.749,84.3 114.749,82.958 114.759,82.958 114.908,82.81 114.908,79.36 115.6,78.667 115.6,77.586 115.128,77.114 115.061,77.114 113.981,76.035 106.896,76.035 104.743,78.187 98.092,78.187 96.183,80.096 95.418,80.096 v1(95.377,80.137) 95.377,79.22
NetQ2_1: Q2.1 R12.2 | length 68.2
  Layer 2 w0.254: R12.2 117.094,77.615 115.992,78.717 115.002,78.717 114.427,79.292 114.427,87.227 114.576,87.376 138.292,87.376 140.589,85.079 140.589,76.155 141.251,75.493 143.082,75.493 143.231,75.642 143.231,77.02 143.58,77.37 149.889,77.37 150.513,76.746 150.513,73.137 150.364,72.988 147.723,72.988 147.574,73.137 Q2.1
NetQ3_1: Q3.1 R3.1 | length 2.7
  Layer 2 w0.254: R3.1 115.57,81.857 115.719,81.708 117.847,81.708 Q3.1
NetQ3_2: Q3.2 SW101.2 U100.23 | length 32
  Top Layer w0.254: U100.23 111.724,64.886 112.452,64.158 SW101.2 119.126,65.76 119.393,66.028 121.837,66.028 122.527,66.718 122.527,72.804 116.992,78.339 116.992,80.75 117.141,80.899 Q3.2
NetQ3_3: Q3.3 R1.2 U1.23 | length 5.8
  Layer 2 w0.254: Q3.3 Q3.3@118.926,81.299 ; R1.2 119.933,82.799 119.933,82.018 119.784,81.869 119.496,81.869 Q3.3@118.926,81.299 ; U1.23 122.424,81.553 120.635,81.553 120.38,81.299 Q3.3@118.926,81.299
NetR5_1: R5.1 U1.5 | length 5
  Layer 3 w0.254: U1.5 124.956,79.324 125.105,79.175 125.315,79.175 125.492,79.352 127.669,79.352 128.013,79.696 128.013,80.192 R5.1
NetR5_2: R5.2 U1.9 | length 2.9
  Layer 3 w0.254: U1.9 127.8,82.046 128.016,81.83 R5.2
NetR12_1: R12.1 U100.38 | length 7.7
  Layer 2 w0.254: U100.38 111.711,72.936 111.711,75.14 112.009,75.438 R12.1
NetU1_20: U1.20 U100.41
NetU1_21: U1.21 U100.40
NetU100_26: U100.26 U101.8 | length 2.7
  Layer 3 w0.254: U100.26 112.692,67.355 112.835,67.355 112.842,67.348 113.442,67.348 114.043,67.949 U101.8
NetU100_27: U100.27 U101.2 | length 14.2
  Layer 2 w0.254: U100.27 113.251,67.973 113.4,67.824 113.4,66.783 113.771,66.412 121.792,66.412 122.164,66.783 122.164,68.056 121,69.219 U101.2
NetU100_29: U100.29 U101.1 | length 12.8
  Layer 2 w0.254: U100.29 113.651,68.737 113.754,68.634 113.754,66.93 113.903,66.781 121.661,66.781 121.81,66.93 121.81,67.14 121,67.949 U101.1
NetU100_30: U100.30 U101.7 | length 2.6
  Layer 2 w0.254: U100.30 114.353,69.473 114.607,69.219 U101.7
NetU100_31: U100.31 U101.6 | length 2.7
  Layer 3 w0.254: U100.31 112.678,69.969 113.629,69.969 114.149,70.489 U101.6
NetU100_32: U100.32 U101.3 | length 14.3
  Layer 2 w0.254: U100.32 112.678,70.477 113.54,70.477 113.712,70.65 113.712,72.616 113.978,72.883 114.307,72.883 114.323,72.899 121.633,72.899 121.798,72.734 121.798,71.287 121,70.489 U101.3
NetU100_33: U100.33 U101.5 | length 2.8
  Layer 3 w0.254: U100.33 113.772,70.973 113.792,70.993 113.934,70.993 114.7,71.759 U101.5
valim: B2.5 B3.14 B4.5 B5.5 DARR6.1 DARR7.1 DARR8.1 | length 67
  Top Layer w0.254: DARR6.1 111.491,41.021 111.872,40.64 v1(115.174,40.64) ; DARR7.1 v1(115.174,40.64) ; DARR8.1 118.984,41.148 118.476,40.64 v1(115.174,40.64) ; B2.5 126.226,54.189 126.058,54.358 125.847,54.358 123.448,51.958 v1(123.448,46.833) ; B5.5 126.511,44.044 126.438,44.117 126.213,44.117 125.148,45.182 124.21,45.182 123.448,45.944 v1(123.448,46.833) ; B3.14 129.879,54.113 129.256,54.737 125.569,54.737 122.978,52.145 122.978,48.014 122.664,47.7 122.664,47.49 123.321,46.833 v1@123.342,46.833 ; B4.5 133.876,40.762 133.496,40.381 125.073,40.381 122.432,43.023 122.432,45.922 v1@123.342,46.833 ; v1@123.342,46.833 v1(123.448,46.833)
VBUS: C4.1 U1.7 U1.8 | length 6.1
  Top Layer w0.254: U1.7 126.814,81.046 127.015,81.247 127.015,81.736 ; U1.8 126.825,81.546 127.015,81.736 ; C4.1 127.762,82.743 ; v1@129.14,82.32 128.185,82.32 127.762,82.743 ; 127.015,81.736 127.762,82.483 127.762,82.743
  other v1: 129.14,82.34
VCC: DARR2.1 DARR2.2 DARR5.1 J1.A4 J1.A9 J1.B4 J1.B9 | length 92.1
  Top Layer w0.254: 121.419,78.479 126.739,78.479 125.546,77.286 125.546,73.775 131.156,68.165 J1.A9 J1.B4 ; 121.426,78.472 122.42,77.478 122.42,73.412 131.917,63.915 140.346,63.915 ; J1.B9 J1.A4 140.346,63.915 ; DARR5.1 DARR5.1@148.717,56.284 ; DARR2.2 DARR2.1 151.638,56.377 151.535,56.274 151.465,56.274 150.738,55.547 149.524,55.547 148.89,56.181 148.82,56.181 DARR5.1@148.717,56.284 ; 140.346,63.915 139.7,63.269 139.7,58.462 141.334,56.828 141.334,55 142.163,54.172 148.568,54.172 148.717,54.321 DARR5.1@148.717,56.284
VIN: B6.1 B6.8 C6.1 | length 17.7
  Top Layer w0.254: v1(86.7,63.844) 87.799,63.844 88.233,64.277 C6.1@89.382,64.277 ; B6.1 89.551,55.822 89.289,55.561 88.652,55.561 88.352,55.86 88.352,62.726 89.239,63.612 89.239,64.134 C6.1@89.382,64.277 ; B6.8 90.551,62.325 89.408,63.468 C6.1 C6.1@89.382,64.277
VUSB: C10.2 U2.4 | length 4.7
  Top Layer w0.254: U2.4 104.25,43.249 C10.2 106.759,41.719 106.434,41.394 v1(106.434,41.233)
pads on no net: B3.3 B3.4 B3.8 B3.9 B3.12 B3.13 B*2.3 B*2.8 B*2.9 B*2.10 D100.3 D100.4 E1.1 E1.3 J1.A5 J1.A6 J1.A8 J1.B5 J1.B6 J1.B7 J1.S1 J1.S2 J1.S3 J1.S4 J4.4 U1.1 U1.6 U1.10 U1.11 U1.12 U1.13 U1.14 U1.15 U1.17 U1.18 U1.22 U1.24 U1.25 U2.5 U100.5 U100.6 U100.7 U100.8 U100.12 U100.13 U100.14 U100.15 U100.16 U100.19 U100.25 U100.28 U100.34 U100.35 U100.36 U100.39 U100.42 U100.44 U100.45 U100.47 U100.48
copper on no net:
  other v2: 123.656,81.746 124.756,81.746 123.656,82.846 124.756,82.846

## Polygon pours and split planes (outlines as drawn)
GND on Bottom Layer "GND_L04_P002" (solid, pour order 2): 143.256,88.9 84.178,88.9 84.178,38.9 84.267,38.989 142.621,38.989
GND on Bottom Layer "GND_L04_P000" (solid, pour order 0): 154.178,38.9 154.178,77.851 153.924,78.105 144.78,78.105 144.78,39.116 144.907,38.989
GND on Bottom Layer "GND_L04_P001" (solid, pour order 1): 143.256,79.629 144.907,77.978 144.907,38.989 142.621,38.989
no net on Bottom Layer "NONET_L04_P003" (solid, pour order 3): 142.621,38.989 142.621,39.444 142.448,39.617 144.78,39.617 144.78,39.116 144.844,39.052

## Silkscreen, mask and mechanical layers (free items; w line width, h text height)
Mechanical 1:
  lines w0.254: 143.256,88.9 143.256,79.629 144.78,78.105 153.924,78.105 ; 84.178,38.9 154.178,38.9 154.178,88.9 84.178,88.9 84.178,38.9

## Text inside footprints (layer, text, board x,y; h text height)
LS1: Top Overlay "+" at 143.998,77.278 h1.27 r180; Top Overlay "-" at 128.798,77.278 h1.27 r180; Mechanical 13 "+" at 143.998,77.278 h1.27 r180; Mechanical 13 "-" at 128.798,77.278 h1.27 r180
Q2: Mechanical 9 "SOT-23" at 147.108,74.714 h0.5